# Altium PCB PCB2.PcbDoc (part 1 of 2)
Units mm, origin at the board's own origin, x right, y up, seen from the top; angles counter-clockwise.
Board outline 65.4 x 65.4 mm, 4 copper layers (Top Layer, Internal Plane 1, Signal Layer 1, Bottom Layer), stack 0.778 mm thick; 122 components, 87 nets, 418 pads, 912 vias.
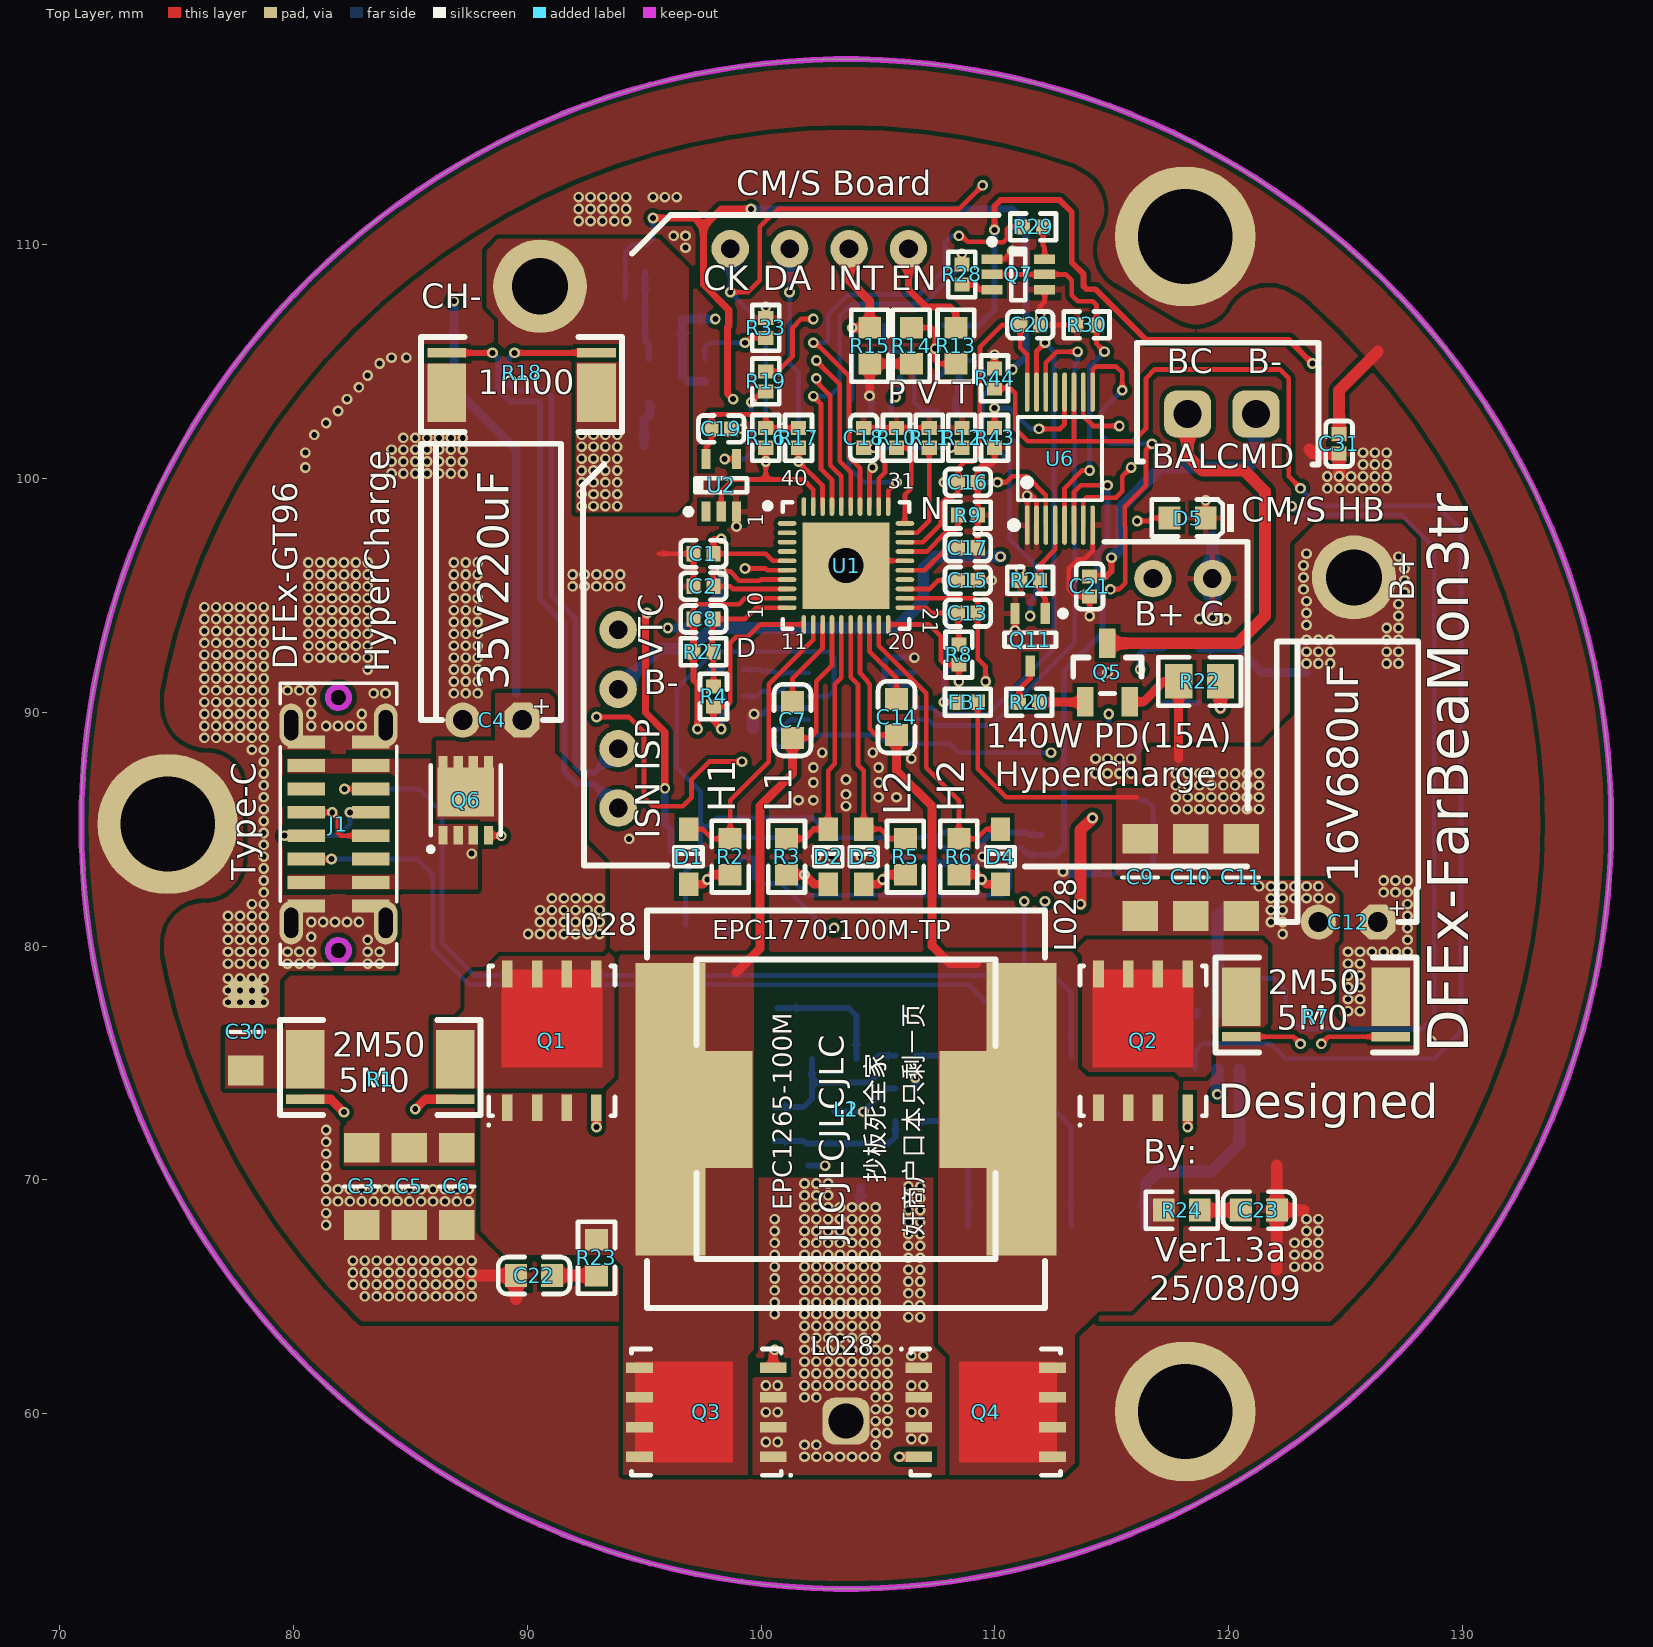
[diagram p0: Top Layer view]
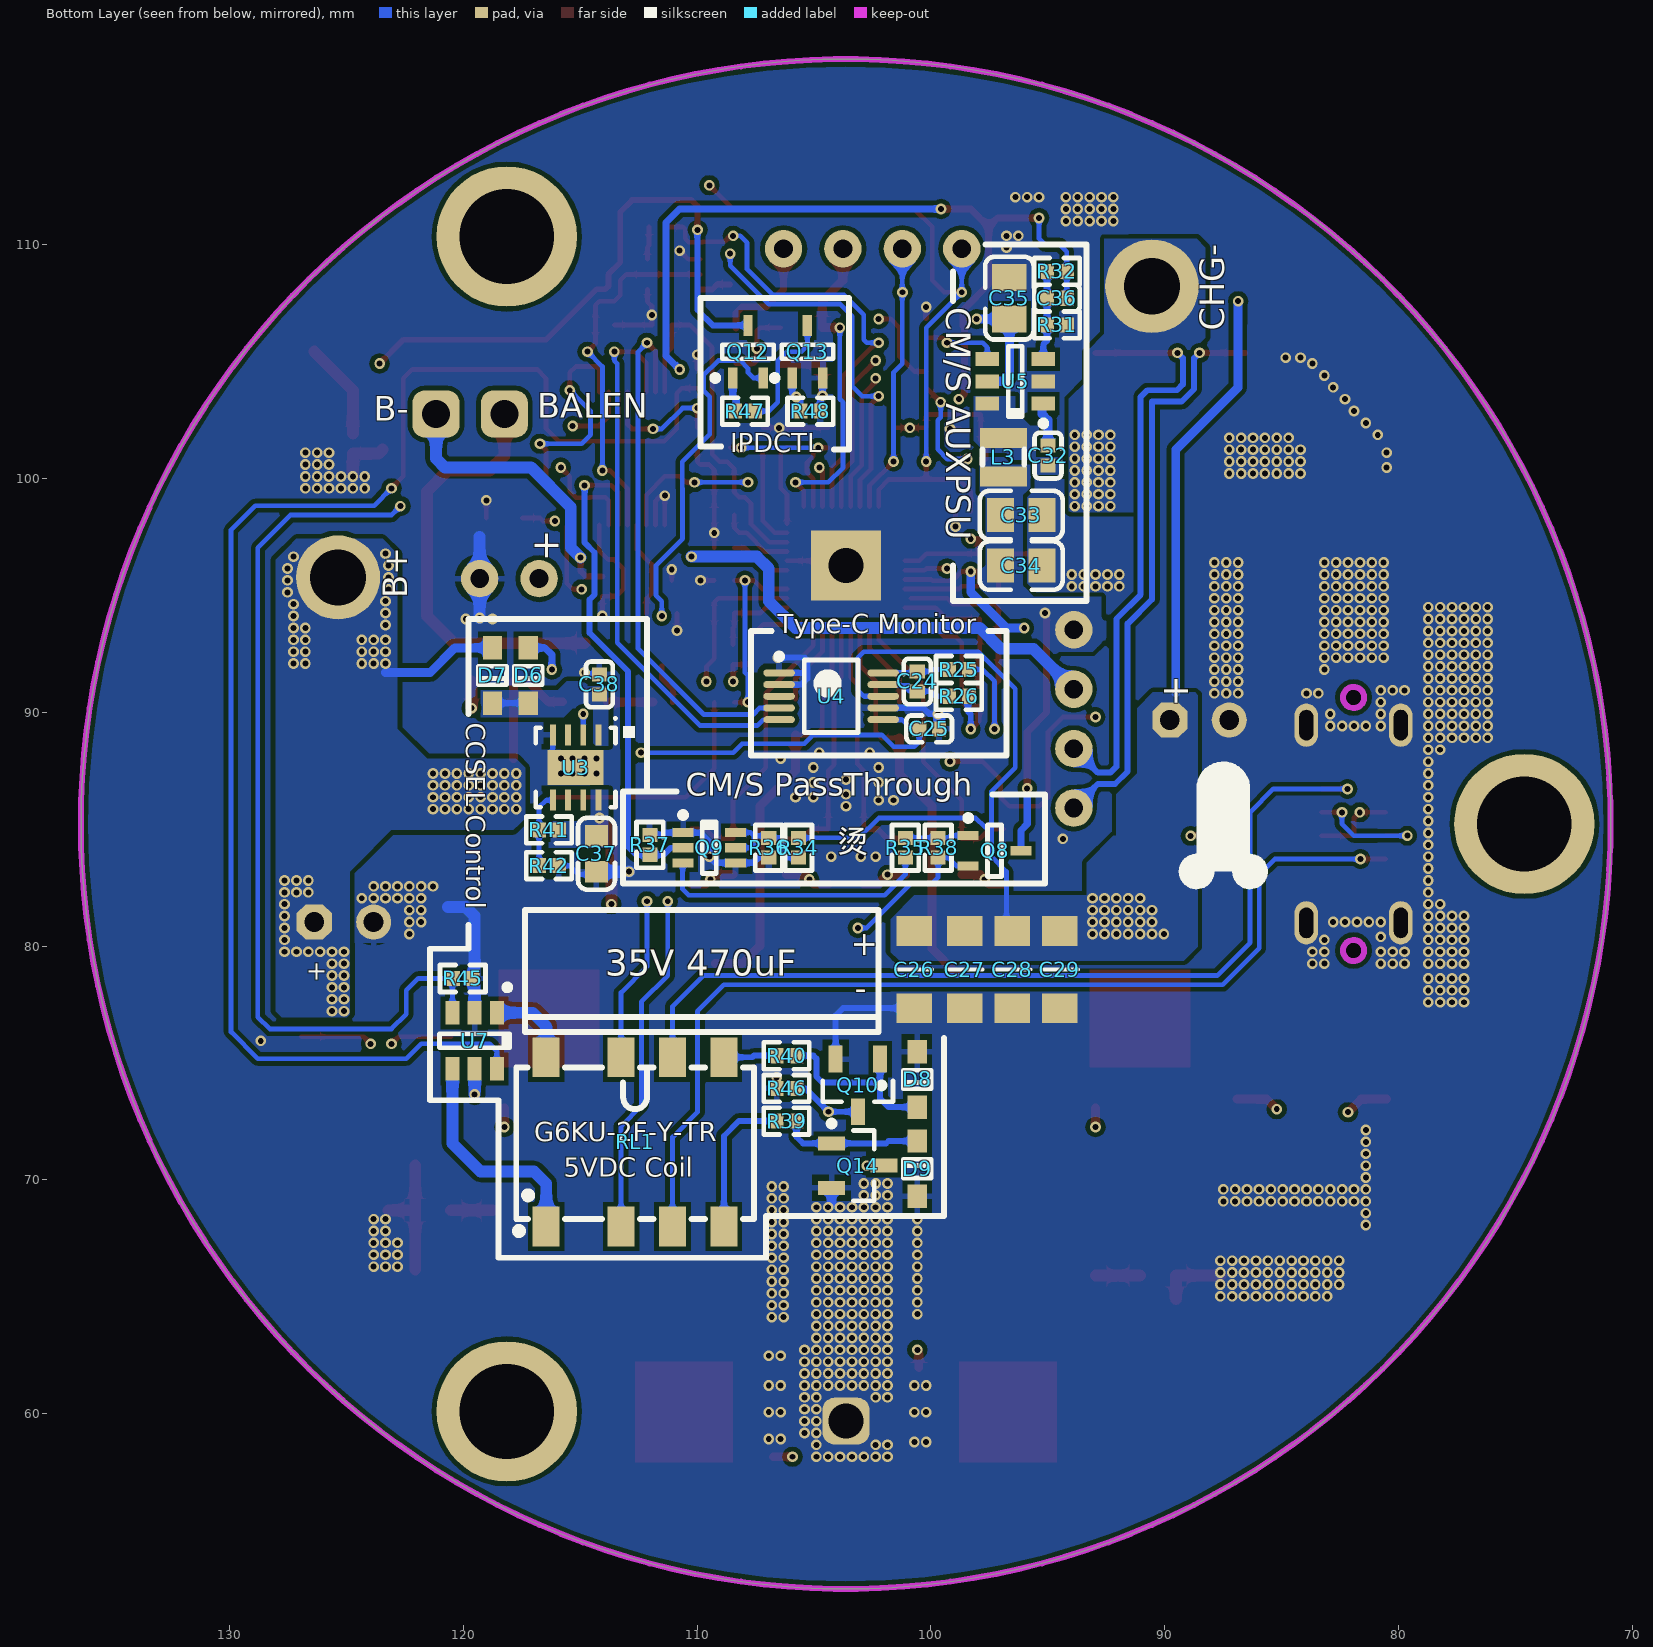
[diagram p1: Bottom Layer view, seen from below]
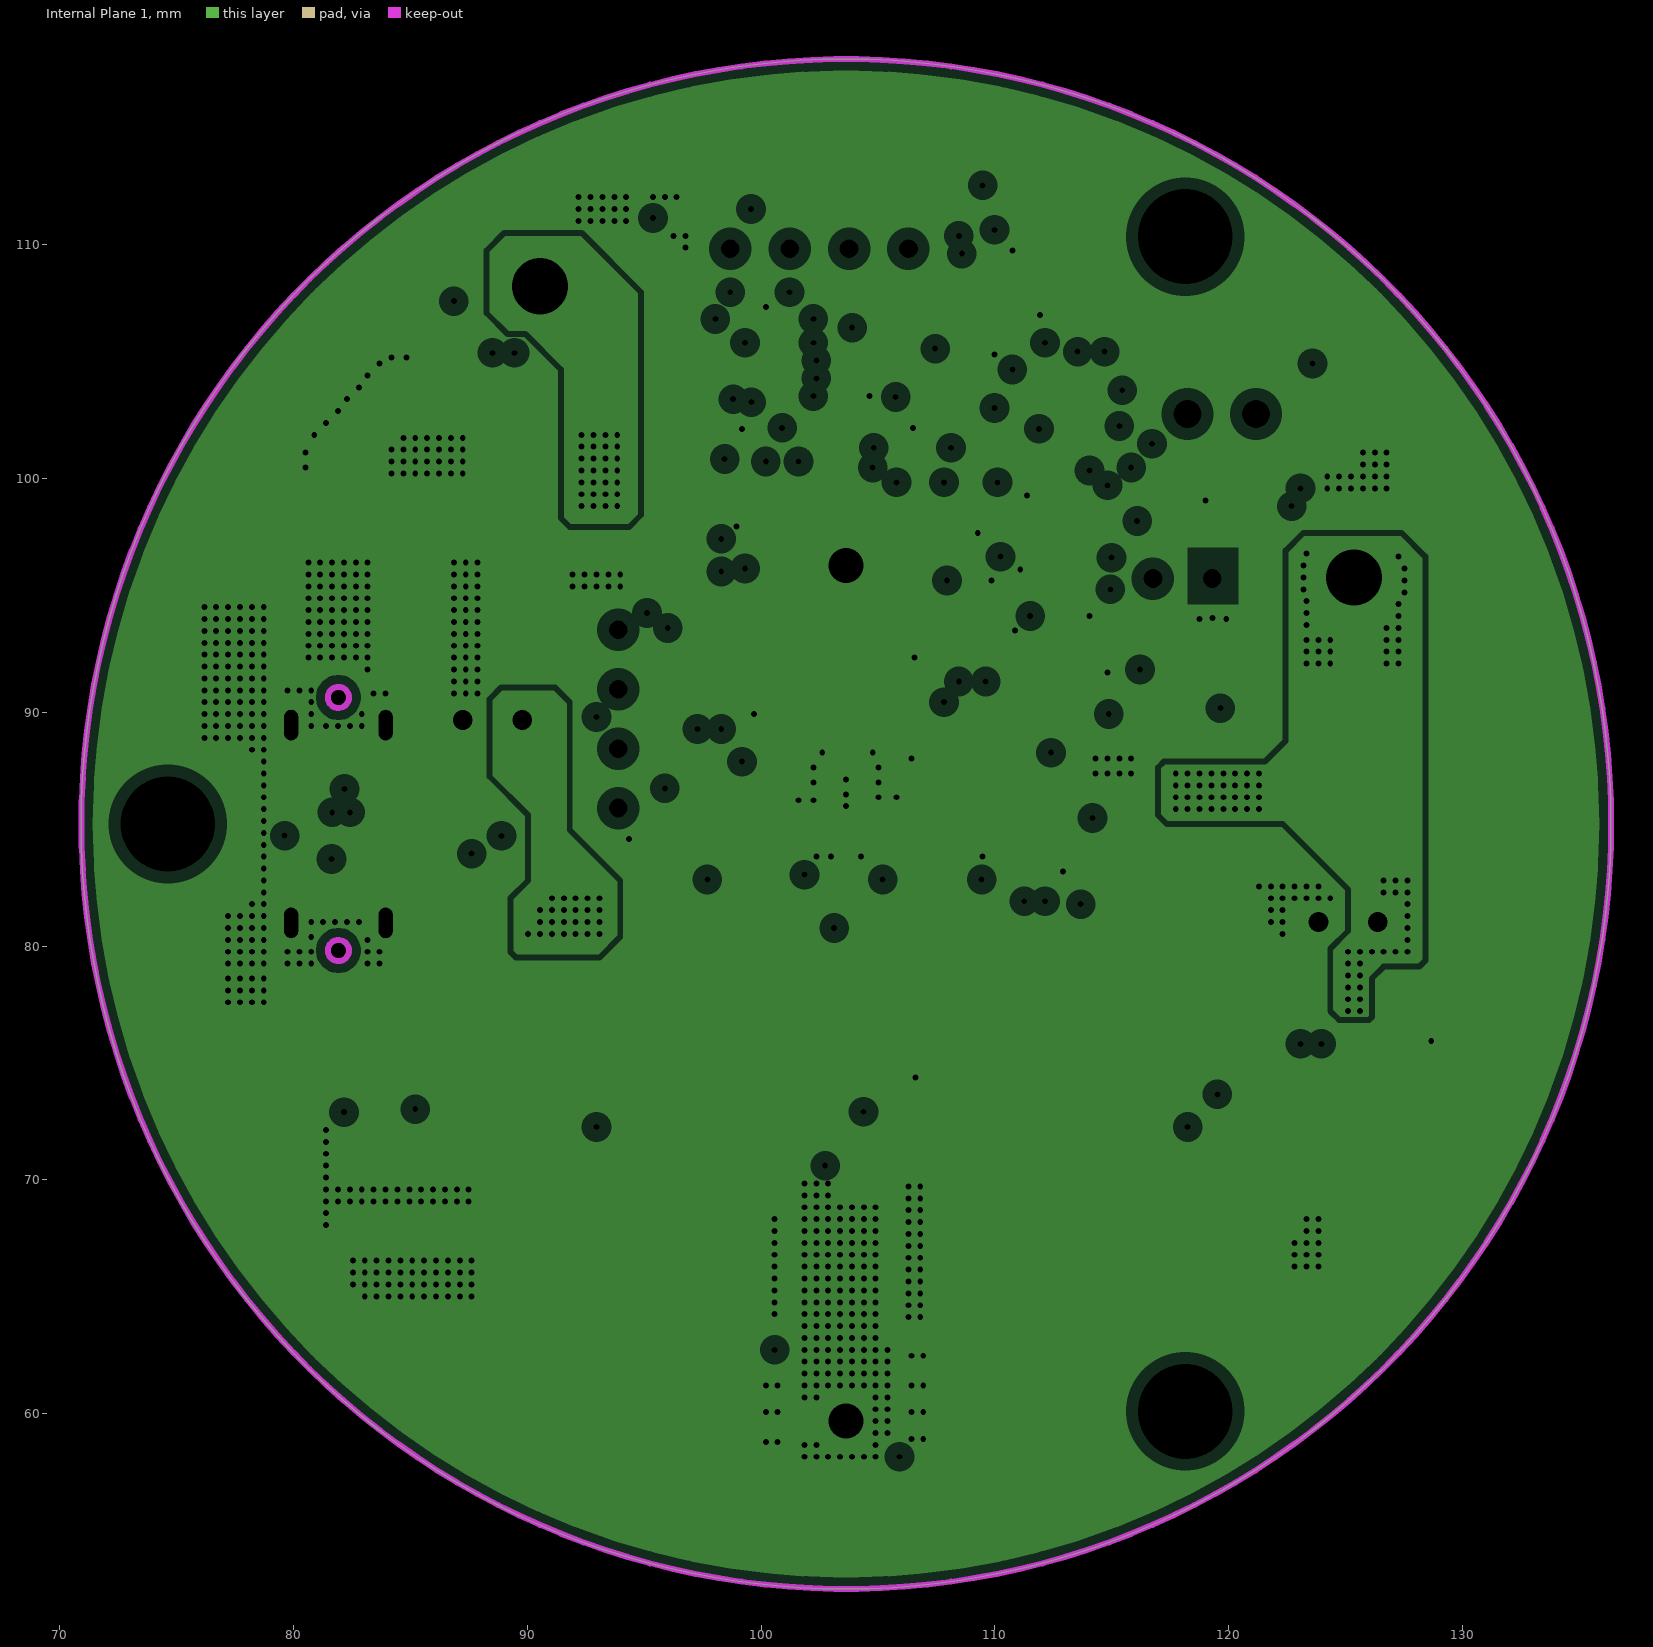
[diagram p2: Internal Plane 1, clearances drawn from the general rule]
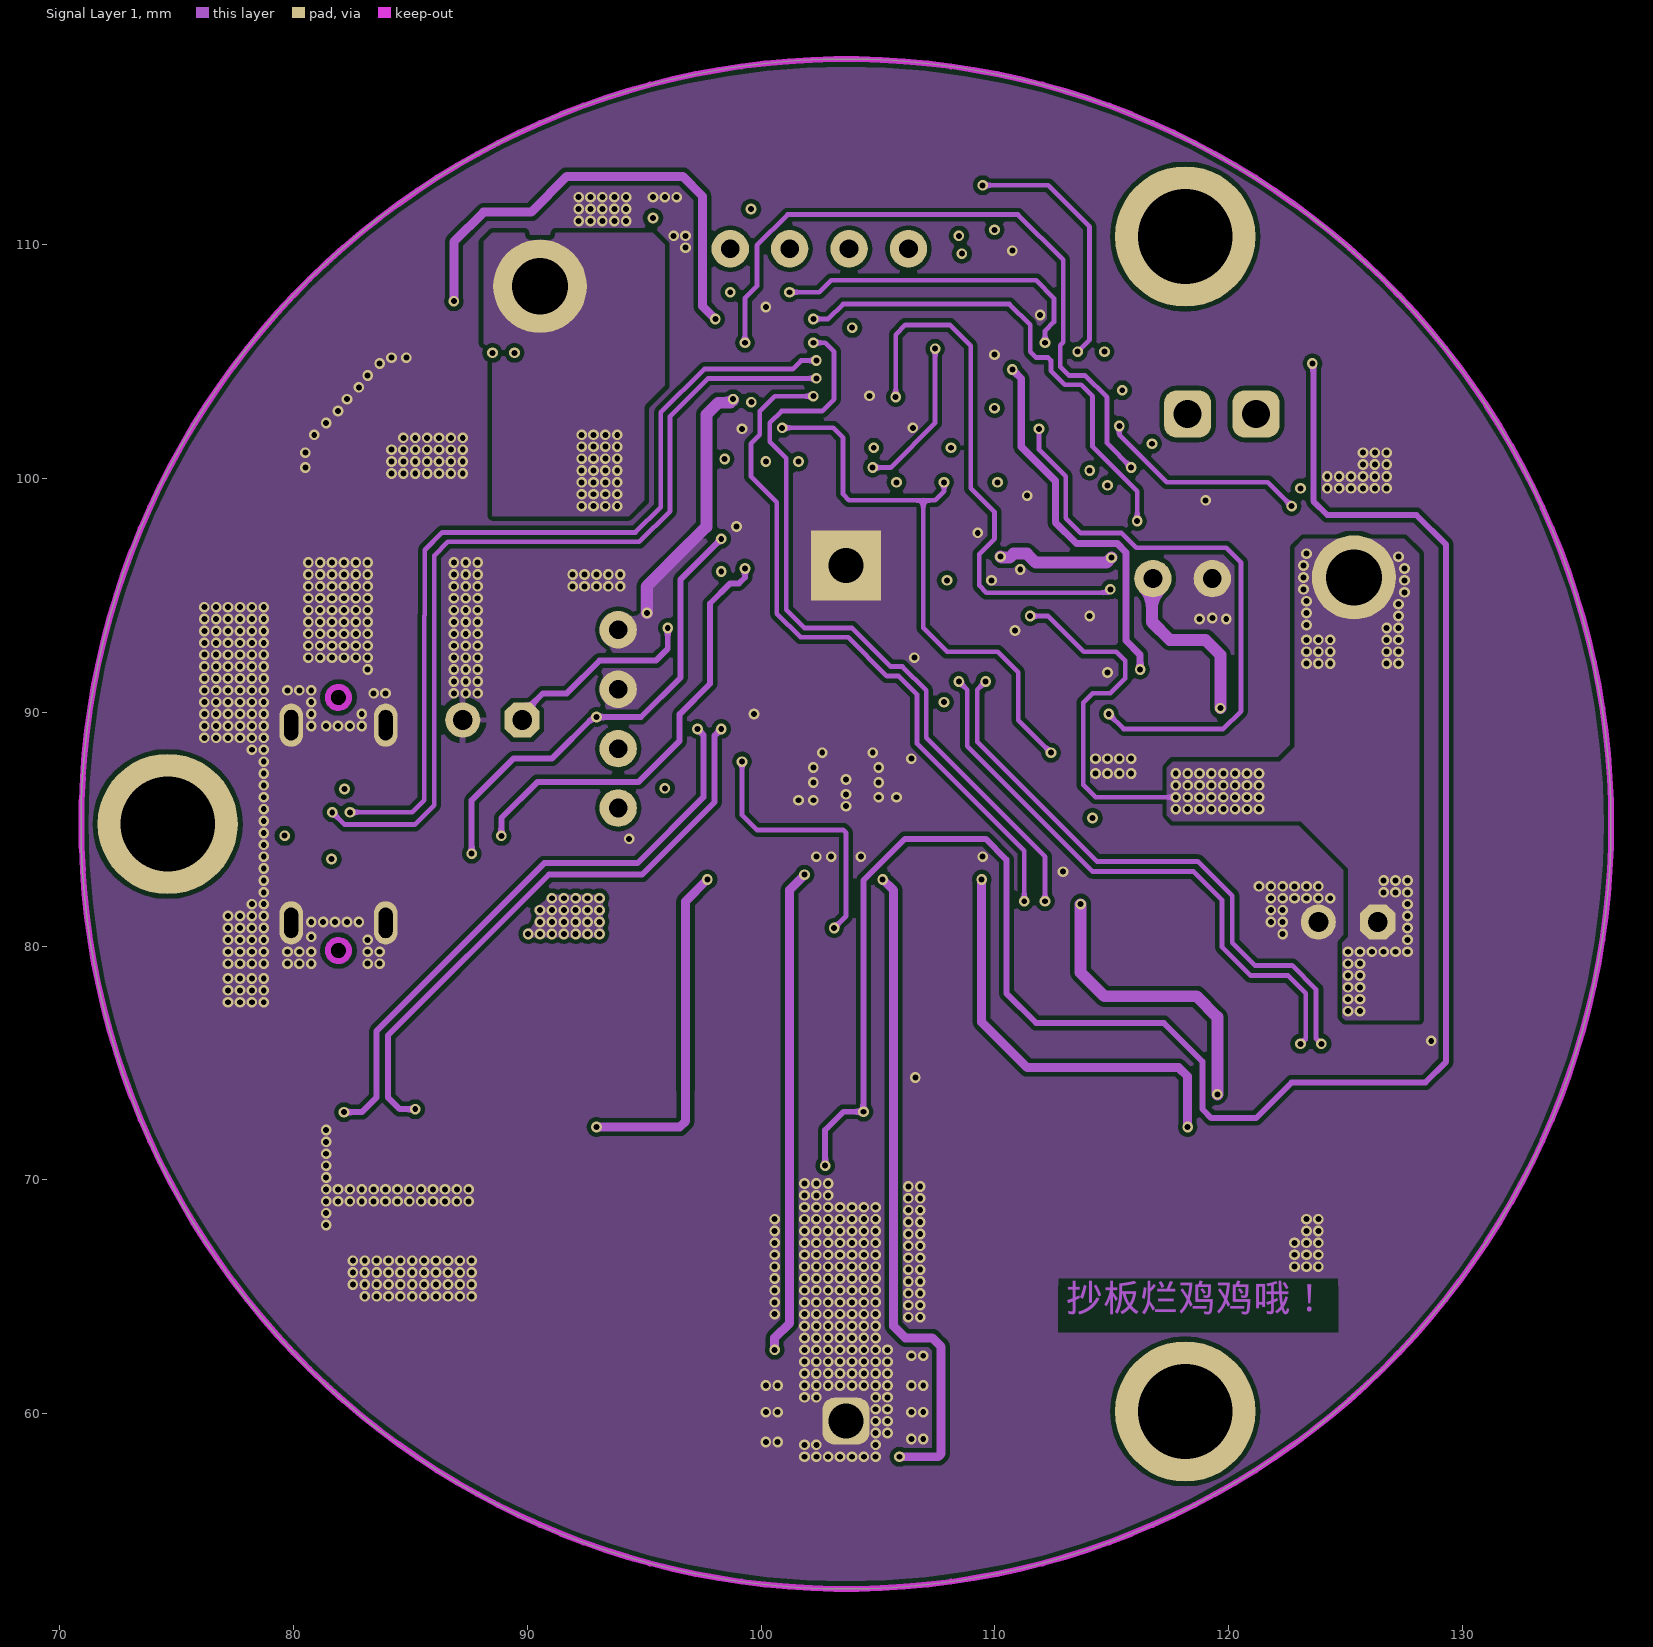
[diagram p3: Signal Layer 1]
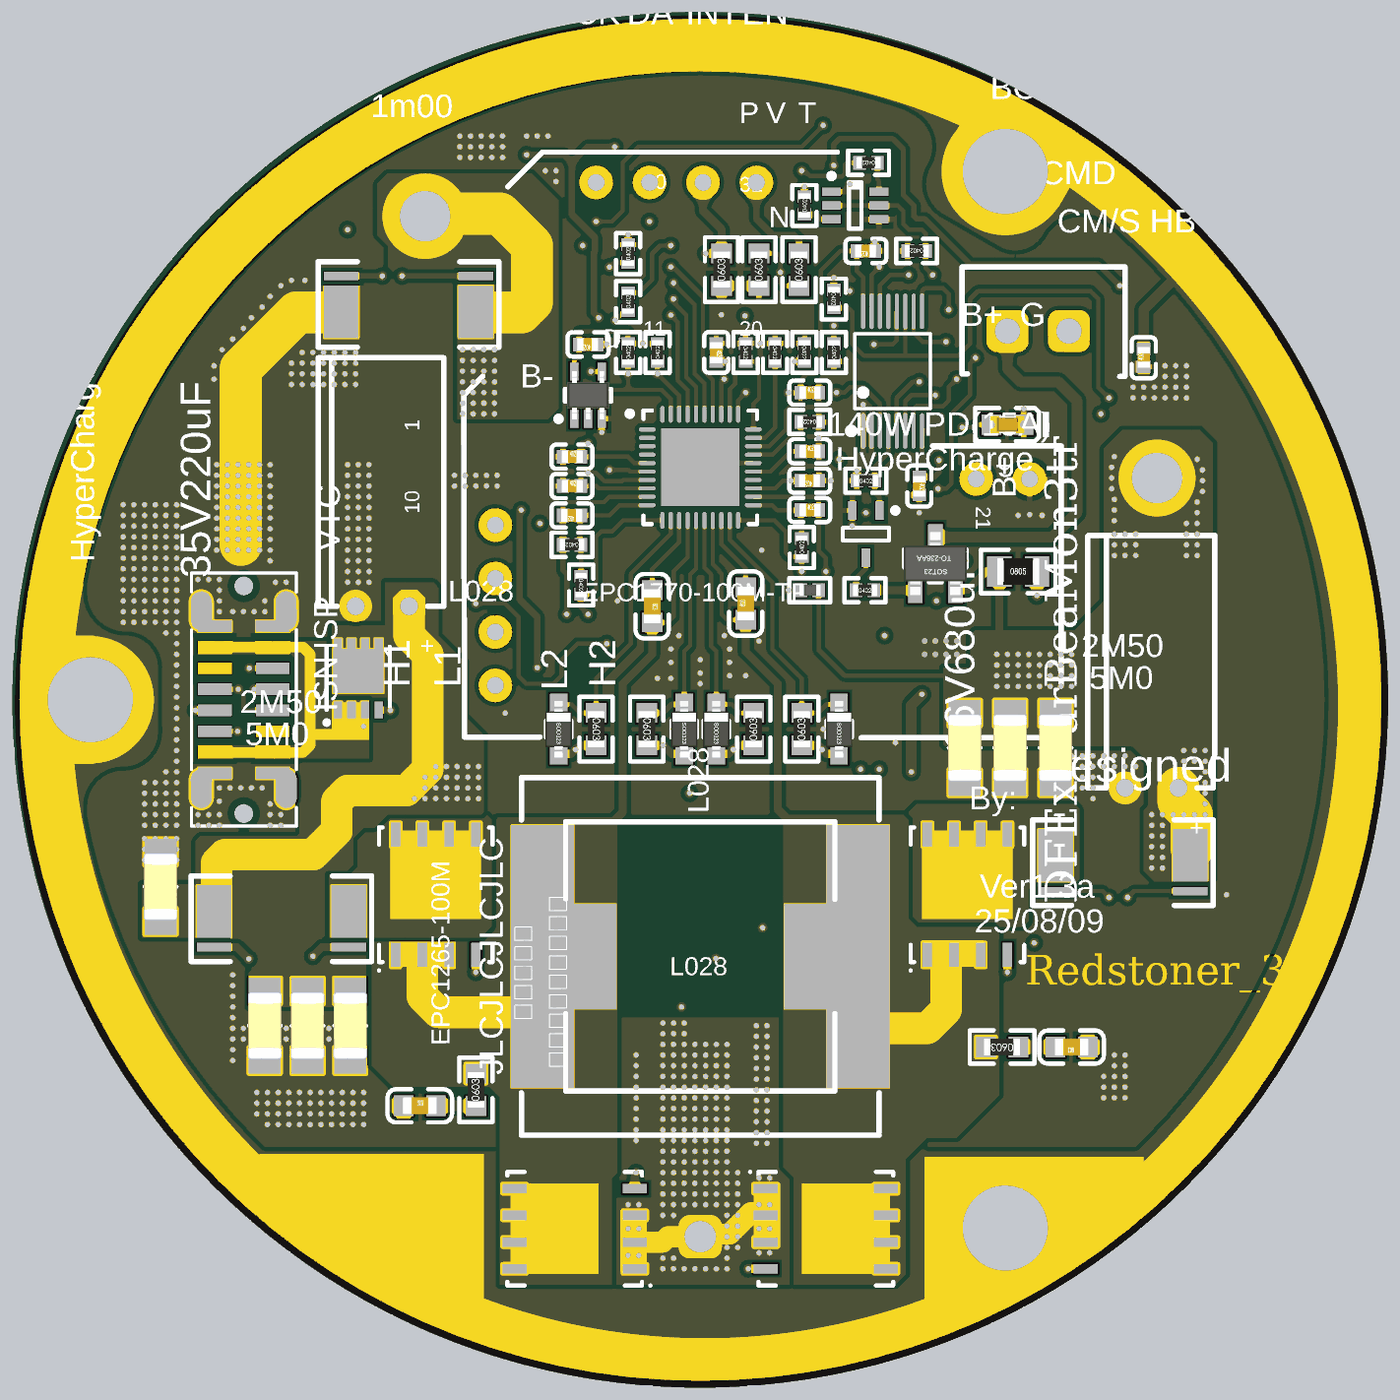
[diagram p5: 3D render of the assembled board from above, using the file's embedded part models]
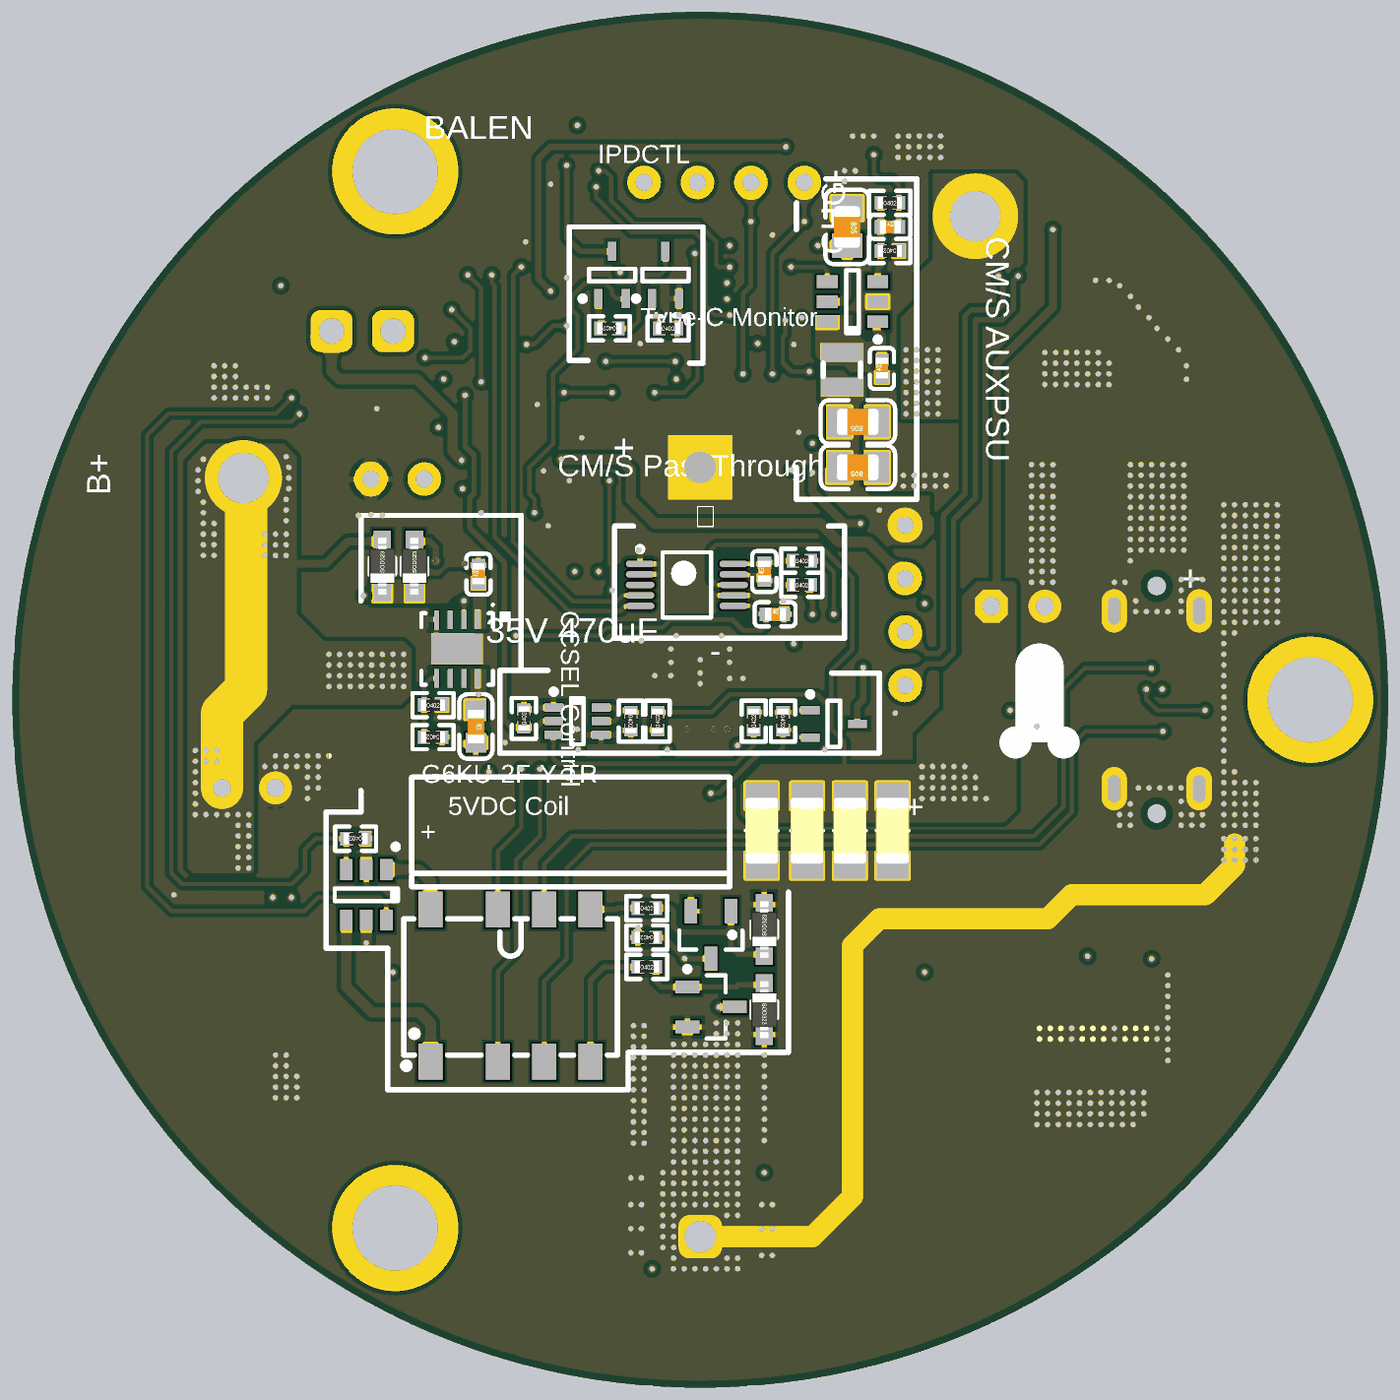
[diagram p6: 3D render of the assembled board from below, using the file's embedded part models]

## Layer stack, top to bottom
Top Solder: solder mask 0.0102, Solder Resist, Dk 3.5
Top Layer: signal copper 0.0356
Dielectric 1: core 0.254, FR-4, Dk 4.2
Internal Plane 1: plane copper 0.036
Dielectric 3: core 0.254, Dk 4.2
Signal Layer 1: signal copper 0.036
Dielectric 4: prepreg 0.127, Dk 4.2
Bottom Layer: signal copper 0.0356
Bottom Solder: solder mask 0.0102, Solder Resist, Dk 3.5

## Board outline
70.932,85.217 ccw(c103.632,85.217) 103.632,52.517 ccw(c103.632,85.217) 136.332,85.217 ccw(c103.632,85.217) 103.632,117.917 ccw(c103.632,85.217)

## Design rules (kind name [scope] priority, off if disabled: settings)
Clearance [All] p1: gap=0.196
DiffPairsRouting [All] p1: maxlimit=0.254 minlimit=0.203 mostfreqgap=0.229 toplayer_minwidth=0.203 toplayer_maxwidth=0.254 toplayer_prefwidth=0.254 midlayer1_minwidth=0.203 midlayer1_maxwidth=0.254 midlayer1_prefwidth=0.254 bottomlayer_minwidth=0.203 bottomlayer_maxwidth=0.254 bottomlayer_prefwidth=0.254 maxuncoupledlength=12.7
PlaneClearance [All] p1: clearance=0.508
PlaneConnect [All] p1: planeconnectstyle=Direct reliefexpansion=0.508 reliefentries=4 reliefconductorwidth=0.254 reliefairgap=0.254
PolygonConnect PolygonConnect_1 [IsVia] p1: connectstyle=Direct reliefconductorwidth=0.254 reliefentries=4 polygonreliefangle="90 Angle" airgapwidth=0.254
PolygonConnect [All] p2: connectstyle=Direct reliefconductorwidth=0.254 reliefentries=4 polygonreliefangle="90 Angle" airgapwidth=0.254
RoomDefinition main [InComponentClass('main')] p1: confinementstyle=ConfineIn formatcopy=TRUE lockcomponents=FALSE outline 178.943,24.257 229.489,24.257 229.489,39.37 178.943,39.37
RoutingVias [All] p1: holewidth=0.711 width=1.27 viastyle="Through Hole" minholewidth=0.711 minwidth=1.27 maxholewidth=0.711 maxwidth=1.27
SolderMaskExpansion [All] p1: expansion=0.102
Width [All] p1: maxlimit=50.8 minlimit=0.203 preferedwidth=0.254
27 further rules are at their usual default settings.

## Classes and differential pairs
differential pair ISEN: +ISEN_P -ISEN_N
differential pair BATIS: +BATIS_P -BATIS_N
differential pair IOUTSEN: +IOUTSEN_P -IOUTSEN_N

## Components (designator, comment, footprint, x,y, rotation, side; value= is the part's Value field where it differs from the comment)
C1 "100nF (104) 10% 50V" 0402_C 97.536,96.774 r0 top
C2 "470NF (474) 10% 50V" 0402_C 97.536,95.377 r0 top
C3 "C3216X5R1V226M160AC" 1206C 82.931,69.723 r90 top
C4 "SPZ1VM221E12O00RA" ElecCap_Hori 88.519,89.662 r90 top
C5 "C3216X5R1V226M160AC" 1206C 84.963,69.723 r90 top
C6 "C3216X5R1V226M160AC" 1206C 86.995,69.723 r90 top
C7 "220nF (224) 10% 25V" 0603_C 101.346,89.662 r270 top
C8 "470nF (474) 10% 10V" 0402_C 97.536,93.98 r180 top
C9 "C3216X5R1V226M160AC" 1206C 116.205,82.931 r90 top
C10 "C3216X5R1V226M160AC" 1206C 118.364,82.931 r90 top
C11 "C3216X5R1V226M160AC" 1206C 120.523,82.931 r90 top
C12 "SPT1CM681F14OR" ElecCap_Hori 125.095,81.026 r90 top
C13 "1.0uF (105) 10% 25V" 0402_C 108.839,94.234 r0 top
C14 "220nF (224) 10% 25V" 0603_C 105.791,89.789 r90 top
C15 "100nF (104) 10% 50V" 0402_C 108.839,95.631 r180 top
C16 "10uF (106) 20% 10V" 0402_C 108.839,99.822 r0 top
C17 "10uF (106) 20% 10V" 0402_C 108.839,97.028 r0 top
C18 "100nF (104) 10% 16V" 0402_C 104.394,101.727 r270 top
C19 "100nF (104) 10% 16V" 0402_C 98.298,102.108 r180 top
C20 "100nF (104) 10% 16V" 0402_C 111.506,106.553 r180 top
C21 "10nF (103) 10% 50V" 0402_C 114.046,95.377 r270 top
C22 "3.3nF (332) 10% 50V" 0603_C 90.297,65.913 r0 top
C23 "3.3nF (332) 10% 50V" 0603_C 121.285,68.707 r180 top
C24 "10uF (106) 20% 10V" 0402_C 100.584,91.313 r90 bottom
C25 "100nF (104) 10% 16V" 0402_C 100.076,89.281 r180 bottom
C26 "C3216X5R1V226M160AC" 1206C 100.711,78.994 r90 bottom
C27 "C3216X5R1V226M160AC" 1206C 98.552,78.994 r90 bottom
C28 "C3216X5R1V226M160AC" 1206C 96.52,78.994 r90 bottom
C29 "C3216X5R1V226M160AC" 1206C 94.488,78.994 r90 bottom
C30 "C3216X5R1V226M160AC" 1206C 77.978,76.327 r270 top
C31 "10nF (103) 10% 50V" 0402_C 124.714,101.473 r90 top
C32 "100nF (104) 10% 16V" 0402_C 94.996,100.965 r90 bottom
C33 "GRM21BR6YA106KE43L" 0805_C 96.139,98.425 r0 bottom
C34 "GRM21BR6YA106KE43L" 0805_C 96.139,96.266 r0 bottom
C35 "GRM21BR6YA106KE43L" 0805_C 96.647,107.696 r270 bottom
C36 "22pF (220) 5% 50V" 0402_C 94.615,107.696 r180 bottom
C37 "10uF (106) 10% 10V" 0603_C 114.3,83.947 r270 bottom
C38 "100nF (104) 10% 50V" 0402_C 114.173,91.186 r90 bottom
D1 "B5819WS S4" SOD-323 96.901,83.82 r270 top
D2 "B5819WS S4" SOD-323 102.87,83.82 r270 top
D3 "B5819WS S4" SOD-323 104.394,83.82 r270 top
D4 "B5819WS S4" SOD-323 110.236,83.82 r270 top
D5 "绿灯 0603" 0603_LED_S1 118.237,98.298 r180 top
D6 "1N5819WS S4" SOD-323 117.221,91.567 r90 bottom
D7 "1N5819WS S4" SOD-323 118.745,91.567 r90 bottom
D8 "CESD12VD3" SOD-323 100.584,74.295 r90 bottom
D9 "CESD12VD3" SOD-323 100.584,70.485 r270 bottom
FB1 "EBMS100505A050" 0402_L 108.839,90.424 r0 top
J1 "TYPEC-300-BCP16H105" TYPE-C-SMD_TYPE-C16PIN 81.932,85.217 r90 top locked
L1 "EPC1770-100M-TP" IND1770-HD 103.632,73.017 r0 top locked
L2 "EPC1265-100M-TP" EPC1265-xxxM 103.632,73.017 r0 top
L3 "FTC252010S220MBCA" SWPA252010S 96.901,100.076 r90 bottom
Q1 "IAUCN04S7L028ATMA1" SON/DFN5x6(MOS) 91.059,75.946 r90 top locked
Q2 "IAUCN04S7L028ATMA1" SON/DFN5x6(MOS) 116.332,75.946 r90 top
Q3 "IAUCN04S7L028ATMA1" SON/DFN5x6(MOS) 97.663,60.071 r180 top locked
Q4 "IAUCN04S7L028ATMA1" SON/DFN5x6(MOS) 109.601,60.071 r0 top locked
Q5 "SS8550 Y2" SOT-23(SOT-23-3) 114.808,91.694 r270 top
Q6 "BSZ018N04LS6" DFN-8_L3.0-W3.0-P0.65-BL 87.376,86.233 r0 top
Q7 "2N7002DW" SC70-6 110.998,108.712 r0 top
Q8 "BSS84PW" SC70-3 97.282,84.074 r180 bottom
Q9 "2N7002DW" SC70-6 109.474,84.201 r180 bottom
Q10 "MMBFJ177LT1G" SOT-23_N 103.124,74.041 r270 bottom locked
Q11 "2N7002KW" SC70-3 111.506,93.091 r270 top
Q12 "SS8550 Y2" SC70-3 107.823,105.41 r90 bottom
Q13 "2N7002KW" SC70-3 105.283,105.41 r90 bottom
Q14 "MMBFJ177LT1G" SOT-23_N 103.124,70.612 r180 bottom
R1 "2512 2.5mΩ 1%" 2512-Virtual4Wire 80.518,75.057 r0 top
R2 "0.5Ω (0R50) ±1%" 0603_R 98.679,83.82 r270 top
R3 "0.5Ω (0R50) ±1%" 0603_R 101.092,83.82 r270 top
R4 "51Ω (51R0) ±1%" 0402_R 97.969,90.669 r270 top
R5 "0.5Ω (0R50) ±1%" 0603_R 106.172,83.82 r90 top
R6 "0.5Ω (0R50) ±1%" 0603_R 108.458,83.82 r90 top
R7 "2512 2.5mΩ 1%" 2512-Virtual4Wire 120.523,77.724 r0 top
R8 "10Ω (10R0) ±1%" 0402_R 108.458,92.456 r90 top
R9 "6.2KΩ (6801) ±1%" 0402_R 108.839,98.425 r180 top
R10 "9.1KΩ (9101) ±1%" 0402_R 105.791,101.727 r270 top
R11 "9.1KΩ (9101) ±1%" 0402_R 107.188,101.727 r270 top
R12 "10KΩ (1002) ±1%" 0402_R 108.585,101.727 r270 top
R13 "47KΩ (3302) ±1%" 0603_R 108.331,105.664 r90 top
R14 "10KΩ (1002) ±1%" 0603_R 106.426,105.664 r90 top
R15 "330KΩ (3303) ±1%" 0603_R 104.648,105.664 r90 top
R16 "10KΩ (1002) ±1%" 0402_R 100.203,101.727 r90 top
R17 "10KΩ (1002) ±1%" 0402_R 101.6,101.727 r90 top
R18 "HoLR2512-3.5W-1mR-1%" 2512-Virtual4Wire 92.964,103.759 r180 top
R19 "2KΩ (2001) ±1%" 0402_R 100.203,104.14 r90 top
R20 "10KΩ (1002) ±1%" 0402_R 111.462,90.424 r0 top
R21 "10KΩ (1002) ±1%" 0402_R 111.506,95.631 r0 top
R22 "1.0Ω (1R0) ±1%" 0805_R 118.745,91.313 r0 top
R23 "2.2Ω (2R20) ±1%" 0603_R 92.964,66.675 r90 top
R24 "2.2Ω (2R20) ±1%" 0603_R 117.983,68.707 r180 top
R25 "4.7Ω (4R70) ±1%" 0402_R 98.806,91.821 r180 bottom
R26 "4.7Ω (4R70) ±1%" 0402_R 98.806,90.678 r180 bottom
R27 "3KΩ (3001) ±1%" 0402_R 97.536,92.583 r180 top
R28 "0402-DNP" 0402_R 108.585,108.712 r90 top
R29 "5.1KΩ (5101) ±1%" 0402_R 111.633,110.744 r180 top
R30 "10KΩ (1002) ±1%" 0402_R 113.919,106.553 r180 top
R31 "33KΩ (3302) ±1%" 0402_R 94.615,106.553 r0 bottom
R32 "499KΩ (4993) ±1%" 0402_R 94.615,108.839 r180 bottom
R33 "10KΩ (1002) ±1%" 0402_R 100.203,106.426 r90 top
R34 "200KΩ (2003) ±1%" 0402_R 105.664,84.201 r90 bottom
R35 "100KΩ (1003) ±1%" 0402_R 101.092,84.201 r90 bottom
R36 "200KΩ (2003) ±1%" 0402_R 106.934,84.201 r270 bottom
R37 "10KΩ (1002) ±1%" 0402_R 112.014,84.328 r90 bottom
R38 "100KΩ (1003) ±1%" 0402_R 99.695,84.201 r270 bottom
R39 "5.1KΩ (5101) ±1%" 0402_R 106.172,72.517 r180 bottom
R40 "5.1KΩ (5101) ±1%" 0402_R 106.172,75.311 r180 bottom
R41 "510KΩ (5103) ±1%" 0402_R 116.332,84.963 r180 bottom
R42 "150KΩ (1503) ±1%" 0402_R 116.332,83.439 r0 bottom
R43 "10KΩ (1002) ±1%" 0402_R 109.982,101.727 r90 top
R44 "10KΩ (1002) ±1%" 0402_R 109.982,104.267 r270 top
R45 "10KΩ (1002) ±1%" 0402_R 120.015,78.613 r0 bottom
R46 "22KΩ (2202) ±1%" 0402_R 106.172,73.914 r0 bottom
R47 "10KΩ (1002) ±1%" 0402_R 107.95,102.87 r0 bottom
R48 "10KΩ (1002) ±1%" 0402_R 105.156,102.87 r180 bottom
RL1 "G6KU-2F-Y-TR DC5" RELAY-SMD_G6K-2F-Y 112.649,71.628 r180 bottom
U1 "IP2366_I2C" QFN40-IP2366 103.632,96.266 r0 top
U2 "SN74LVC1G14DCKR" DCK0005A_N 98.298,99.695 r90 top
U3 "MPQ2013AGQ-AEC1" MPQ2013A-QFN8 115.189,87.63 r270 bottom
U4 "INA226AIDGSR" MSOP-10 104.267,90.678 r180 bottom
U5 "LGS5148" SOT95P245X110-6N 96.393,104.14 r0 bottom
U6 "PCA9538DGV" TVSOP-16_L3.6-W4.4-P0.40-LS6.4-BL 112.776,100.838 r0 top
U7 "CN8021B" SOT95P245X110-6N 119.507,75.946 r270 bottom locked

## Footprints (in the part's own frame and the unit in brackets; to place one, negate y for a bottom-side part, rotate by r counter-clockwise, add the part's x,y. Pads: shape width x height; smd on the part's side, far side on the other; paste and mask are expansions set on the pad)
0402_C [mm]
  rect 0.6x0.65 smd mask+0.051: 1(-0.425,0) 2(0.425,0)
  silkscreen extent -0.97,-0.58 0.97,0.58, body extent -0.48,-0.3 0.52,0.3, height 0.2
0402_L [mm]
  rect 0.6x0.65 smd mask+0.051: 1(-0.425,0) 2(0.425,0)
  silkscreen extent -0.97,-0.58 0.97,0.58, body extent -0.51,-0.26 0.54,0.26, height 0.36
0402_R [mm]
  rect 0.6x0.65 smd mask+0.051: 1(-0.425,0) 2(0.425,0)
  silkscreen extent -0.97,-0.58 0.97,0.58, body extent -0.57,-0.27 0.58,0.28, height 0.41
0603_C [mm]
  rect 0.93x0.98 smd: 1(-0.77,0) 2(0.77,0)
  silkscreen extent -1.53,-0.79 1.54,0.79, body extent -0.8,-0.4 0.8,0.4, height 0.3
0603_LED_S1 [mm]
  rect 0.93x0.98 smd: A(0.77,0) K(-0.77,0)
  silkscreen extent -1.98,-0.79 1.54,0.79, body extent -0.8,-0.4 0.8,0.4, height 0.6
0603_R [mm]
  rect 0.93x0.98 smd: 1(-0.77,0) 2(0.77,0)
  silkscreen extent -1.53,-0.79 1.54,0.79, body extent -0.85,-0.4 0.85,0.4, height 0.56
0805_C [mm]
  rect 1.16x1.47 smd: 1(-0.89,0) 2(0.89,0)
  silkscreen extent -1.77,-1.04 1.77,1.04, body extent -1,-0.62 1,0.63, height 0.77
0805_R [mm]
  rect 1.16x1.47 smd: 1(-0.89,0) 2(0.89,0)
  silkscreen extent -1.77,-1.04 1.77,1.03, body extent -1,-0.62 1,0.63, height 0.49
1206C [mil]
  rect 50x60 smd: 1(-65,0) 2(65,0)
  silkscreen extent 0,-30 0,30, body extent -63,-31 63,31, height 37
2512-Virtual4Wire [mm] "2512 Shunt Resistor Virtual 4Wire Connection"
  rect 1.65x2.5 smd mask+0.05: 0(0,0.1) 1(6.401,0.1)
  rect 1.65x0.4 smd mask+0.05: 2(0,-1.6) 3(6.401,-1.6)
  silkscreen extent -1.09,-2.28 7.49,1.78, body extent 0,-1.78 6.48,1.4, height 1
DCK0005A_N [mm] "SOT23, 5-Leads, Body 2.15x1.4mm, Pitch 0.65mm, IPC Medium Density"
  rect 0.85x0.4 smd: 1(-1.125,0.65) 2(-1.125,0) 3(-1.125,-0.65) 4(1.125,-0.65) 5(1.125,0.65)
  silkscreen extent -1.25,-1.1 0.3,1.52, body extent -1.14,-1 1.14,1, height 1.1
DFN-8_L3.0-W3.0-P0.65-BL [mm]
  rect 0.4x0.8 smd paste-100 mask+0.051: 1(-0.975,-1.5) 2(-0.325,-1.5) 3(0.325,-1.5) 4(0.975,-1.5) 5(0.975,1.5) 6(0.325,1.5) 7(-0.325,1.5) 8(-0.975,1.5)
  rect 2.4x2.1 smd paste-100 mask+0.051: 8(0,0.35)
  silkscreen extent -1.6,-2.2 1.5,1.5, body extent -1.52,-1.52 1.52,1.52, height 1.2
ElecCap_Hori [mm] "水平安装的电容 6x12mm"
  oct 1.5x1.5 hole 0.85 mask+0.03: 1(0,-1.27)
  round 1.5 hole 0.85 mask+0.03: 2(0,1.27)
  silkscreen extent 0,-2.92 1.4,3.05
EPC1265-xxxM [mm] "汇磁羟基粉1265电感"
  rect 3.25x5 smd mask+0.03: 1(-5.625,0) 2(5.625,0)
  silkscreen extent -6.4,-6.4 6.4,6.4, body extent -6.35,-6.35 6.35,6.35, height 6.5
IND1770-HD [mm] "1770尺寸电感（高密度封装需要打胶固定）"
  rect 3x12.5 smd mask+0.03: 1(-7.5,0) 2(7.5,0)
  silkscreen extent -8.5,-8.5 8.5,8.5, body extent -8.51,-8.51 8.51,8.51, height 7
MPQ2013A-QFN8 [mm] "SON, 8-Leads, Body 3.00x3.00mm, Pitch 0.65mm, Thermal Pad 2.40x1.49mm, IPC Medium Density"
  rect 0.9x0.25 smd mask+0.03: 1(-1.395,0.975) 2(-1.395,0.325) 3(-1.395,-0.325) 4(-1.395,-0.975) 5(1.395,-0.975) 6(1.395,-0.325) 7(1.395,0.325) 8(1.395,0.975)
  rect 1.49x2.4 smd mask+0.03: 9(0,0)
  silkscreen extent -2.15,-1.7 1.7,1.75, body extent -1.55,-1.55 1.55,1.55, height 1
MSOP-10 [mm] "TSSOP, 10-Leads, Body 3.00x3.00mm, Pitch 0.50mm, IPC Medium Density"
  oval 1.35x0.3 smd: 1(-2.225,1) 2(-2.225,0.5) 3(-2.225,0) 4(-2.225,-0.5) 5(-2.225,-1) 6(2.225,-1) 7(2.225,-0.5) 8(2.225,0) 9(2.225,0.5) 10(2.225,1)
  silkscreen extent -2.35,-1.55 1.15,1.82, body extent -1.55,-1.55 1.55,1.55, height 1.1
QFN40-IP2366 [mm] "QFN, 40-Leads, Body 5.00x5.00mm, Pitch 0.40mm, Thermal Pad 3.70x3.70mm, IPC Medium Density"
  oval 0.8x0.2 smd mask+0.02: 1(-2.52,1.8) 2(-2.52,1.4) 3(-2.52,1) 4(-2.52,0.6) 5(-2.52,0.2) 6(-2.52,-0.2) 7(-2.52,-0.6) 8(-2.52,-1) 9(-2.52,-1.4) 10(-2.52,-1.8) 21(2.52,-1.8) 22(2.52,-1.4) 23(2.52,-1) 24(2.52,-0.6) 25(2.52,-0.2) 26(2.52,0.2) 27(2.52,0.6) 28(2.52,1) 29(2.52,1.4) 30(2.52,1.8)
  oval 0.2x0.8 smd mask+0.02: 11(-1.8,-2.52) 12(-1.4,-2.52) 13(-1,-2.52) 14(-0.6,-2.52) 15(-0.2,-2.52) 16(0.2,-2.52) 17(0.6,-2.52) 18(1,-2.52) 19(1.4,-2.52) 20(1.8,-2.52) 31(1.8,2.52) 32(1.4,2.52) 33(1,2.52) 34(0.6,2.52) 35(0.2,2.52) 36(-0.2,2.52) 37(-0.6,2.52) 38(-1,2.52) 39(-1.4,2.52) 40(-1.8,2.52)
  rect 3.7x3.7 smd mask+0.02: 41(0,0)
  silkscreen extent -3.47,-2.7 2.7,2.7, body extent -2.55,-2.55 2.55,2.55, height 0.8
RELAY-SMD_G6K-2F-Y [mm]
  rect 1.15x1.7 smd: 1(-3.8,-3.618) 2(-0.6,-3.618) 3(1.6,-3.618) 4(3.8,-3.618) 5(3.8,3.618) 6(1.6,3.618) 7(-0.6,3.618) 8(-3.8,3.618)
  silkscreen extent -5.11,-3.96 5.08,3.18, body extent -5.08,-3.3 5.08,3.18, height 5.2
SC70-3 [mm] "3 Lead SC70(SOT-323) package for small Transistor"
  rect 0.9x0.4 smd mask+0.05: 1(-1.125,0.65) 2(-1.125,-0.65) 3(1.125,0)
  silkscreen extent -1.25,-1.1 0.3,1.52, body extent -0.67,-1.1 0.67,1.1, height 1.1
SC70-6 [mm] "SOT23, 6-Leads, Body 2.00x2.10mm, Pitch 0.65mm, IPC Medium Density"
  rect 0.9x0.4 smd mask+0.05: 1(-1.125,0.65) 2(-1.125,0) 3(-1.125,-0.65) 4(1.125,-0.65) 5(1.125,0) 6(1.125,0.65)
  silkscreen extent -1.25,-1.1 0.3,1.52, body extent -0.67,-1.1 0.67,1.1, height 1.1
SOD-323 [mm]
  rect 1x0.83 smd: 1(1.18,0) 2(-1.18,0)
  silkscreen extent -0.4,-0.6 0.4,0.6, body extent -1.35,-0.62 1.35,0.63, height 1.1
SON/DFN5x6(MOS) [mm] "SON, 8-Leads, Body 5.00x6.00mm, Pitch 1.27mm, Thermal Pad 4.00x3.53mm, IPC Low Density"
  rect 1.15x0.45 smd: 1(-2.86,1.905) 2(-2.86,0.635) 3(-2.86,-0.635) 4(-2.86,-1.905) 5(2.86,-1.905) 6(2.86,-0.635) 7(2.86,0.635) 8(2.86,1.905)
  Top Layer region: -1.143,-2.159 3.048,-2.159 3.048,2.159 -1.143,2.159
  silkscreen extent -3.65,-2.7 3.2,2.75, body extent -3.05,-2.55 3.05,2.55, height 1.05
SOT95P245X110-6N [mm] "SOT23, 6-Leads, Body 2.90x2.45mm, Pitch 0.95mm, IPC Medium Density"
  rect 1x0.6 smd: 1(-1.2,0.95) 2(-1.2,0) 3(-1.2,-0.95) 4(1.2,-0.95) 5(1.2,0) 6(1.2,0.95)
  silkscreen extent -1.32,-1.5 0.3,1.92, body extent -0.7,-1.5 0.7,1.5, height 1.1
SOT-23(SOT-23-3) [mm]
  rect 1.25x0.7 smd: 1(1.25,-0.95) 2(1.25,0.95) 3(-1.25,0)
  silkscreen extent -0.65,-1.46 0.9,1.46, body extent -1.5,-1.5 1.5,1.5, height 1.3
SOT-23_N [mm] "SOT23, 3-Leads, Body 2.9x1.3mm, Pitch 0.95mm, Lead Span 2.5mm, IPC Medium Density"
  rect 1.15x0.6 smd: 1(-1.125,0.95) 2(-1.125,-0.95) 3(1.125,0)
  silkscreen extent -0.2,-1.5 0.7,1.5, body extent -0.7,-1.5 0.7,1.5, height 1.1
SWPA252010S [mm] "小型绕线电感"
  rect 0.85x2 smd mask+0.03: 1(0,0) 2(1.65,0)
  silkscreen extent 0.51,-0.89 1.14,0.89, body extent -0.13,-1.02 1.78,1.02, height 3.06
TVSOP-16_L3.6-W4.4-P0.40-LS6.4-BL [mm]
  oval 0.2x1.687 smd mask+0.02: 1(-1.4,-2.844) 2(-1,-2.844) 3(-0.6,-2.844) 4(-0.2,-2.844) 5(0.2,-2.844) 6(0.6,-2.844) 7(1,-2.844) 8(1.4,-2.844) 9(1.4,2.844) 10(1,2.844) 11(0.6,2.844) 12(0.2,2.844) 13(-0.2,2.844) 14(-0.6,2.844) 15(-1,2.844) 16(-1.4,2.844)
  silkscreen extent -2.11,-2.99 1.8,1.78
TYPE-C-SMD_TYPE-C16PIN [mm]
  oval 1.85x1 hole 0.6 slot 1.3 at 0 deg: 1(-4.225,-2.02) 1(-4.225,2.02) 1(4.225,-2.02) 1(4.225,2.02)
  rect 0.55x1.6 smd paste-100 mask+0.051: 1(-3.5,-1.376) 1(-3.5,1.376) 1(3.5,-1.376) 1(3.5,1.376) 2(-2.5,-1.376) 2(-2.5,1.376) 2(2.5,-1.376) 2(2.5,1.376) A5(-1.5,1.376) A6(-0.5,1.376) A7(0.5,1.376) A8(1.5,1.376) B5(1.5,-1.376) B6(0.5,-1.376) B7(-0.5,-1.376) B8(-1.5,-1.376)
  Keep-Out Layer circle w0.005: c-5.41,0 r0.45
  Keep-Out Layer circle w0.005: c5.41,0 r0.45
  Keep-Out Layer board cut-out: -4.96,0 -5.005,0.195 -5.129,0.352 -5.31,0.439 -5.51,0.439 -5.691,0.352 -5.815,0.195 -5.86,0 -5.86,0 -5.815,-0.195 -5.691,-0.352 -5.51,-0.439 -5.31,-0.439 -5.129,-0.352 -5.005,-0.195 -4.96,0
  Keep-Out Layer board cut-out: 5.86,0 5.815,0.195 5.691,0.352 5.51,0.439 5.31,0.439 5.129,0.352 5.004,0.195 4.96,0 4.96,0 5.004,-0.195 5.129,-0.352 5.31,-0.439 5.51,-0.439 5.691,-0.352 5.815,-0.195 5.86,0
  Keep-Out Layer circle w0.254: c-5.41,0 r0.45
  Keep-Out Layer circle w0.254: c5.41,0 r0.45
  silkscreen extent -6,-2.5 6.03,2.49

## Part data
C1 C15 C18 C19 C20 C25 C32 C38: library part "0402 100nF (104) 10% 16V", "贴片电容"
C2 C13: library part "0402 1.0uF (105) 10% 25V", "贴片电容"
C3 C5 C6 C9 C10 C11 C26 C27 C28 C29 C30: library part Cap, "1206尺寸TDK MLCC 35V 22uF"
C4: library part CAP2, "直插固态电容，耐压35V容量220uF，尺寸6x11"
C7 C14: library part "0603 220nF (224) 10% 25V", "贴片电容"
C8: library part "0402 470nF (474) 10% 10V", "贴片电容"
C12: library part CAP2, "直插固态电容，耐压16V容量680uF，尺寸6x11"
C16 C17 C24: library part "0402 10uF (106) 20% 6.3V", "贴片电容"
C21 C31: library part "0402 10nF (103) 10% 50V", "贴片电容"
C22 C23: library part "0603 3.3nF (332) 10% 50V", "贴片电容"
C33 C34: library part "0805 22uF (226) 20% 25V", "0805 10uF±10% 35V X5R贴片电容"
C35: library part "0805 4.7uF (475) 10% 25V", "0805 10uF±10% 35V X5R贴片电容"
C36: library part "0402 22pF (220) 5% 50V", "贴片电容"
C37: library part "0603 10uF (106) 10% 10V", "贴片电容"
D1 D2 D3 D4 D6 D7: library part "SOD-323 1N4148WS T4", "二极管"
D5: library part "0603 绿灯", "发光二极管"
D8 D9: library part "SOD-323 1N4148WS T4", "TVS瞬态抑制二极管，12V击穿电压"
FB1: library part "0402 12nH  5%", "贴片磁珠 200mA 5R±25% 100MHz"
J1: "立贴16Pin Type-C接口，总高度10.5mm"
L1: library part "Inductor Iron", "汇磁一体成型羟基粉电感，1770尺寸，10uH±20% 9.50mΩ DCR 25A饱和电流"
L2: library part "Inductor Iron", "汇磁一体成型羟基粉电感，1265尺寸，10uH±20%"
L3: library part "Inductor Iron", "小型化一体成型T-CORE热压电感，22uH 2.5*2.0*1.0mm尺寸"
Q1 Q2 Q3 Q4: library part "SON/DFN5x6 MOS", "40V, N-Ch, 2.80m? max, Automotive MOSFET, SSO8(5x6), OptiMOS? 7"
Q5: library part "SOT-23 SS8550 Y2", "三极管"
Q6: library part "SON/DFN5x6 MOS", "PDFN3x3 40V 60A 1.8mΩ N-Ch MOSFET"
Q7 Q9: "Dual N-Channel MOSFET 60V340mA SOT-363"
Q8: library part SI2301CDS-T1-GE3, "MOS(场效应管)"
Q10 Q14: library part JFET-P, "SOT-23-3耗尽型场效应管"
Q11 Q13: library part "2N7002 7002", "单N沟道MOSFET(场效应管)"
Q12: library part "SOT-23 SS8550 Y2", "PNP三极管，SOT-323 封装"
R1 R7: library part shunt, "2512尺寸高能电子束焊接合金检流电阻，2.5mΩ 3W 1%"
R2 R3: library part "0603 0Ω (0R0) 1%", "贴片电阻"
R4: library part "0402 51Ω (51R0) 1%", "贴片电阻"
R5 R6: library part "0603 1.5KΩ (1501) 1%", "贴片电阻"
R8: library part "0402 10Ω (10R0) 1%", "贴片电阻"
R9 R10 R11: library part "0402 6.8KΩ (6801) 1%", "贴片电阻"
R12 R16 R17 R20 R21 R30 R33 R37 R43 R44 R45 R47 R48: library part "0402 10KΩ (1002) 1%", "贴片电阻"
R13: library part "0603 33KΩ (3302) 1%", "贴片电阻"
R14: library part "0603 10KΩ (1002) 1%", "贴片电阻"
R15: library part "0603 330KΩ (3303) 1%", "贴片电阻"
R18: library part shunt, "2512尺寸低温飘合金检流电阻1.0mΩ 3.5W 1% TCR＜25PPM"
R19: library part "0402 2KΩ (2001) 1%", "贴片电阻"
R22: library part "0805 0Ω (0R0) 1%", "贴片电阻"
R23 R24: library part "0603 2.2Ω (2R20) 1%", "贴片电阻"
R25 R26: library part "0402 4.7KΩ (4701) 1%", "贴片电阻"
R27: library part "0402 3.3KΩ (3301) 1%", "贴片电阻"
R28: library part "0402 5.1KΩ (5101) 1%", "测试焊点（特殊情况下焊贴片电阻）"
R29 R39 R40: library part "0402 5.1KΩ (5101) 1%", "贴片电阻"
R31: library part "0402 300KΩ (3003) 1%", "贴片电阻"
R32 R41: library part "0402 510KΩ (5103) 1%", "贴片电阻"
R34 R36: library part "0402 200KΩ (2003) 1%", "贴片电阻"
R35 R38: library part "0402 100KΩ (1003) 1%", "贴片电阻"
R42: library part "0402 150KΩ (1503) 1%", "贴片电阻"
R46: library part "0402 22KΩ (2202) 1%", "贴片电阻"
RL1: "欧姆龙双组触点磁保持贴片继电器"
U1: "支持多种快充协议，最高140W功率的充放电管理SoC"
U2: "Single Schmitt-Trigger Inverter, DCK0005A, LARGE T&R"
U3: library part MPQ2013AGQ-xx-AEC1, "MPS 40V LDO with Enable pin QFN3x3 package"
U4: "具有警报功能的双向36V，16位，高精度I2C总线功率计"
U5: "48V输入，600mA同步降压转换器，SOT-23-6封装"
U6: "具有中断输出、复位和配置寄存器的远程 8 位 I2C 和 SMBus 低功耗   I/O 扩展器"
U7: library part CN8023B, "SOT23-6封装 双向磁保持继电器驱动IC 电压3.5-40V 450mA驱动能力"

## Free pads (board coordinates)
  rrect50% 2x2 hole 1.5 mask+0.03: 0(103.632,59.69)
  round 6 hole 4.05 mask+0.03: 3(74.632,85.217) 4(118.132,60.102) 5(118.132,110.332)
  round 1.6 hole 0.8 mask+0.03: 6(93.893,85.899) 6(93.893,88.439) 6(93.893,90.979) 6(93.893,93.519) 6(98.683,109.809) 6(116.753,95.709) 6(119.293,95.709) 7(101.223,109.809) 8(103.763,109.809) 9(106.303,109.809)
  rect 3x3 hole 1.5 mask+0.03: 10(103.632,96.266)
  round 4 hole 2.4 mask+0.03: 11(90.551,108.204)
  round 3.6 hole 2.4 mask+0.03: 11(125.349,95.758)
  rrect50% 2x2 hole 1.2 mask+0.03: 12(118.237,102.743) 13(121.158,102.743)

## Via types
v1: diameter 0.457, hole 0.254, Top Layer to Bottom Layer, tented both sides, 912 vias

## Nets (pads, with @x,y where several pads share a name; then routed paths per layer and width w, separated by ;. In a path a pad name is that pad's centre, name@x,y a point inside that pad or via, vN(x,y) a via of type N, cw(c..) or ccw(c..) an arc to the next point about the centre after c; other vN are vias at no path point)
5V: C37.1 R41.2 U3.8 U7.5 | length 17.8
  Top Layer w0.508: v1(113.665,81.788) 113.665,84.963 v1(114.173,85.471)
  Signal Layer 1 w0.508: v1(113.665,81.788) 113.665,78.867 114.681,77.851 118.618,77.851 119.507,76.962 v1(119.507,73.66)
  Bottom Layer w0.508: v1(119.507,73.66) U7.5@119.507,74.746
5VEN: R43.2 U3.2 U6.12 | length 31.7
  Top Layer w0.203: R43.2@109.982,102.152 v1(109.982,102.997) ; v1(111.887,102.108) 112.776,102.108 112.976,102.308 U6.12@112.976,103.682
  Signal Layer 1 w0.203: v1(111.887,102.108) 111.887,101.219 113.03,100.076 113.03,98.298 113.673,97.655 115.415,97.655 116.041,97.028 119.888,97.028 120.523,96.393 120.523,90.043 119.761,89.281 115.499,89.281 v1(114.864,89.916)
  Bottom Layer w0.203: v1(109.982,102.997) 110.617,102.997 111.506,102.108 v1(111.887,102.108) ; U3.2@114.864,89.025 v1(114.864,89.916)
226_N: C24.1 R26.1 U4.9 | length 3.2
  Bottom Layer w0.203: R26.1@99.231,90.678 99.822,90.678 100.032,90.888 C24.1@100.584,90.888 100.921,90.888 100.965,90.932 100.965,91.141 102.042,91.141 U4.9@102.042,91.178
226_P: C24.2 R25.1 U4.10 | length 2.9
  Bottom Layer w0.203: R25.1@99.231,91.821 99.949,91.821 100.032,91.738 C24.2@100.584,91.738 100.644,91.678 U4.10@102.042,91.678
\T\C\P\T\_\E\N\: Q9.2 R37.1 U6.6 | length 22
  Top Layer w0.203: U6.6@113.376,97.994 113.376,99.406 113.665,99.695 v1(114.808,99.695)
  Bottom Layer w0.254: Q9.2@110.599,84.201 111.125,84.201 111.423,83.903 R37.1@112.014,83.903 112.605,83.903 112.946,84.244 112.946,91.737 114.597,93.388 114.597,94.808 114.384,95.022 114.384,96.823 114.808,97.247 v1(114.808,99.695)
ABST: C32.2 U5.1 | length 1.9
  Bottom Layer w0.381: C32.2@94.996,101.39 94.996,102.489 95.25,102.743 95.25,103.133 U5.1@95.193,103.19
AEN: R33.1 U5.4 U6.7 | length 36.8
  Top Layer w0.203: v1(99.314,105.791) 99.524,106.001 R33.1@100.203,106.001 ; U6.7@113.776,97.994 113.776,99.044 113.919,99.187 114.572,99.187 114.59,99.169 115.171,99.169 115.443,99.441 115.443,100.076 v1(115.824,100.457)
  Signal Layer 1 w0.203: v1(99.314,105.791) 99.314,107.696 99.822,108.204 99.822,109.96 101.132,111.27 110.98,111.27 112.921,109.329 112.921,105.809 112.794,105.682 112.794,104.757 113.157,104.394 113.848,104.394 114.79,103.452 114.79,101.491 v1(115.824,100.457)
  Bottom Layer w0.203: U5.4@97.593,105.09 97.593,105.594 97.79,105.791 v1(99.314,105.791)
AFB: C36.1 R31.2 R32.1 U5.3 | length 3.8
  Bottom Layer w0.254: R32.1@95.04,108.839 C36.1@95.04,107.696 95.04,106.426 95.04,105.874 95.193,105.721 U5.3@95.193,105.09
ASW: C32.1 L3.2 U5.6
BALCMD: pad.12 Q5.3 | length 18.3
  Top Layer w0.508: Q5.3@114.808,92.944 120.376,92.944 121.539,94.107 121.539,99.441 120.65,100.33 118.872,100.33 118.237,100.965 pad.12@118.237,102.743
BALEN: Q11.1 R21.2 U6.4 | length 4.1
  Top Layer w0.203: Q11.1@112.156,94.216 112.156,94.854 111.931,95.079 R21.2@111.931,95.631 111.931,96.31 112.576,96.955 U6.4@112.576,97.994
BATIS_N: R7.2 R8.1 U1.20 | length 32.9
  Top Layer w0.203: U1.20@105.432,93.746 107.168,93.746 107.696,93.218 107.696,92.202 107.867,92.031 R8.1@108.458,92.031 v1(108.458,91.313) ; R7.2@120.523,76.124 122.758,76.124 v1(123.063,75.819)
  Signal Layer 1 w0.203: v1(108.458,91.313) 108.814,90.957 108.814,88.544 114.173,83.185 118.491,83.185 119.71,81.966 119.71,79.958 120.928,78.74 122.53,78.74 123.292,77.978 123.292,76.048 v1(123.063,75.819)
BATIS_P: C13.2 R7.3 U1.22 | length 35
  Top Layer w0.203: U1.22@106.152,94.866 109.096,94.866 109.264,94.698 C13.2@109.264,94.234 109.264,92.285 109.601,91.948 v1(109.601,91.313) ; v1(123.952,75.819) 124.257,76.124 R7.3@126.924,76.124
  Signal Layer 1 w0.203: v1(109.601,91.313) 109.245,90.957 109.245,88.723 114.352,83.617 118.67,83.617 120.142,82.145 120.142,80.137 121.107,79.172 122.708,79.172 123.723,78.157 123.723,76.048 v1(123.952,75.819)
BATNUM: R9.2 U1.27 | length 3.2
  Top Layer w0.203: U1.27@106.152,96.866 107.082,96.866 107.879,97.663 108.204,97.663 108.414,97.873 R9.2@108.414,98.425
BATT-: C21.1 pad.6@93.893,90.979 pad.13 | length 37.1
  Top Layer w0.254: C21.1@114.046,95.802 114.764,95.802 114.979,96.017 v1(114.979,96.603)
  Signal Layer 1 w0.508: v1(110.236,96.647) 110.28,96.603 110.63,96.603 110.8,96.773 111.362,96.773 111.742,96.393 114.769,96.393 v1(114.979,96.603)
  Bottom Layer w0.508: pad.6@93.893,90.979 95.624,92.71 97.028,92.71 97.917,93.599 105.791,93.599 106.934,94.742 106.934,96.139 107.442,96.647 v1(110.236,96.647) ; v1(114.979,96.603) 115.4,97.024 115.4,98.763 117.094,100.457 120.777,100.457 121.158,100.838 pad.13@121.158,102.743
BST1: C7.1 U1.13 | length 3.8
  Top Layer w0.203: C7.1@101.346,90.432 101.346,91.44 102.632,92.726 U1.13@102.632,93.746
BST2: C14.2 U1.18 | length 3.7
  Top Layer w0.203: U1.18@104.632,93.746 104.632,92.599 105.791,91.44 C14.2@105.791,90.559
CC1: R28.2 RL1.2 U1.37 | length 61.2
  Top Layer w0.203: v1(102.235,103.505) 102.563,103.177 102.563,100.396 103.032,99.927 U1.37@103.032,98.786 ; R28.2@108.585,109.137 v1(108.585,109.601)
  Signal Layer 1 w0.203: v1(102.235,103.505) 100.584,103.505 99.949,102.87 99.949,101.854 99.568,101.473 99.568,100.076 100.675,98.969 100.675,94.214 101.689,93.2 103.721,93.2 105.382,91.539 105.89,91.539 106.662,90.767 106.662,88.664 111.252,84.074 v1(111.252,81.915)
  Bottom Layer w0.203: v1(102.235,103.505) 102.944,103.505 103.368,103.929 103.368,106.924 103.886,107.442 106.934,107.442 108.585,109.093 v1(108.585,109.601) ; v1(111.252,81.915) 111.252,78.74 112.377,77.615 112.377,73.17 113.249,72.298 RL1.2@113.249,68.01
CC2: R29.2 RL1.7 U1.34 | length 60.9
  Top Layer w0.203: v1(102.235,105.791) 102.344,105.791 103.759,104.376 103.759,100.892 104.232,100.419 U1.34@104.232,98.786 ; v1(108.458,110.363) 108.585,110.363 108.839,110.109 109.746,110.109 109.764,110.091 110.364,110.091 110.508,110.235 110.508,110.635 110.617,110.744 R29.2@111.208,110.744
  Signal Layer 1 w0.203: v1(102.235,105.791) 102.743,105.791 103.124,105.41 103.124,103.378 102.616,102.87 100.876,102.87 100.376,102.37 100.376,101.554 101.074,100.856 101.074,94.379 101.854,93.599 103.886,93.599 105.537,91.948 106.045,91.948 107.061,90.932 107.061,88.9 112.141,83.82 v1(112.141,81.915)
  Bottom Layer w0.203: v1(102.235,105.791) 102.743,105.791 102.87,105.918 102.87,106.99 103.721,107.841 106.769,107.841 107.862,108.934 107.862,110.069 108.156,110.363 v1(108.458,110.363) ; v1(112.141,81.915) 112.141,79.121 113.249,78.013 RL1.7@113.249,75.246
CCDOWN: Q7.3 R28.1 | length 1.4
  Top Layer w0.254: R28.1@108.585,108.287 109.137,108.287 109.362,108.062 Q7.3@109.873,108.062
CHG-: pad.11@90.551,108.204 R18.0
  other v1: 92.329,98.806 92.837,98.806 93.345,98.806 93.853,98.806 92.329,99.314 92.837,99.314 93.345,99.314 93.853,99.314 92.329,99.822 92.837,99.822 93.345,99.822 93.853,99.822 92.329,100.33 92.837,100.33 93.345,100.33 93.853,100.33 92.329,100.838 92.837,100.838 93.345,100.838 93.853,100.838 92.329,101.346 92.837,101.346 93.345,101.346 93.853,101.346 92.329,101.854 92.837,101.854 93.345,101.854 93.853,101.854
CSN1: C8.1 R4.1 R27.1 U1.10 | length 6.3
  Top Layer w0.203: R27.1@97.917,92.627 97.917,93.98 99.314,93.98 99.8,94.466 U1.10@101.112,94.466 ; R27.1@97.961,92.583 97.961,91.904 97.969,91.896 R4.1@97.969,91.094
  Top Layer w0.254: R27.1@97.961,92.583 R27.1@97.969,92.575
CSN2: C13.1 R8.2 U1.21 | length 3.7
  Top Layer w0.203: U1.21@106.152,94.466 107.061,94.466 107.293,94.234 C13.1@108.414,94.234 108.414,93.643 108.458,93.599 R8.2@108.458,92.881
EN: R13.1 R14.2 U1.33 | length 11.7
  Top Layer w0.203: U1.33@104.632,98.786 104.632,100.319 v1(104.77,100.457) ; R14.2@106.426,106.434 107.307,106.434 107.442,106.299 107.442,105.029 107.577,104.894 R13.1@108.331,104.894
  Signal Layer 1 w0.203: v1(104.77,100.457) 105.538,100.457 107.442,102.361 v1(107.442,105.537)
GND: C1.1 C2.1 C3.1 C4.2 C5.1 C6.1 C9.1 C10.1 C11.1 C12.2 C15.1 C16.2 C17.2 C18.1 C19.1 C20.1 C21.2 C22.1 C23.1 C25.2 C26.1 C27.1 C28.1 C29.1 C30.1 C31.1 C33.1 C34.1 C35.1 C37.2 C38.2 D5.K D8.1 D9.1 J1.1 pad.0 pad.6@119.293,95.709 pad.10 Q3.1 Q3.2 Q3.3 Q4.1 Q4.2 Q4.3 Q7.1 Q7.4 Q9.1 Q9.4 Q10.2 Q11.2 Q13.2 Q14.2 R9.1 R10.1 R11.1 R12.1 R14.1 R15.1 R18.1 R21.1 R30.2 R31.1 R33.2 R36.2 R37.2 R42.1 R43.1 R44.1 R45.1 R46.2 R48.2 U1.26 U1.41 U2.3 U3.4 U3.9 U4.1 U4.2 U4.7 U5.2 U6.1 U6.2 U6.8 U7.2 | length 80.4
  Top Layer w0.203: 95.631,96.774 C1.1@97.111,96.774 C2.1@97.111,95.377 ; C19.1@98.723,102.108 v1(99.187,102.108) ; v1(98.948,97.932) U2.3@98.948,98.57 ; U1.41@103.832,96.466 U1.26@106.152,96.466 ; C18.1@104.394,102.152 R10.1@105.791,102.152 v1(106.49,102.152) R11.1@107.188,102.152 ; C15.1@109.264,95.631 v1(109.855,95.631) ; C17.2@109.264,97.028 v1(109.264,97.663) C16.2@109.264,99.822 109.264,100.372 109.476,100.584 109.855,100.584 109.982,100.711 R43.1@109.982,101.302 ; Q7.1@109.873,109.362 110.378,109.362 v1(110.744,109.728) ; v1(110.856,93.487) Q11.2@110.856,94.216 ; R21.1@111.081,95.631 v1(111.081,96.095) ; U6.1@111.376,97.994 v1(111.376,99.254) 111.546,99.254 111.776,99.023 U6.2@111.776,97.994 ; Q7.4@112.123,108.062 112.123,107.551 111.931,107.359 v1(111.931,106.978) C20.1@111.931,106.553 R30.2@113.538,106.553 ; v1(114.046,94.107) C21.2@114.046,94.952 113.455,94.952 113.157,95.25 113.157,96.139 113.538,96.52 113.792,96.52 114.176,96.904 U6.8@114.176,97.994 ; D5.K@119.007,98.298 v1(119.007,99.052)
  Top Layer w0.254: R33.2@100.203,106.851 v1(100.203,107.315) ; R44.1@109.982,104.692 v1(109.982,105.283)
  Top Layer w0.381: v1(104.633,103.52) 104.648,103.535 R15.1@104.648,104.894 R14.1@106.426,104.894
  Top Layer w0.508: v1@87.63,65.913 C22.1@89.527,65.913 89.527,64.905 ; 122.047,66.167 122.047,70.612 ; C23.1@122.055,68.707 123.19,68.707 ; 123.444,101.219 123.615,101.048 C31.1@124.714,101.048 v1(124.714,100.076)
  Bottom Layer w0.203: C38.2@114.173,91.611 114.725,91.611 v1(114.808,91.694) ; C37.2@114.3,83.177 114.419,83.058 115.062,83.058 115.443,83.439 R42.1@115.907,83.439 ; U3.9@115.189,87.63 115.443,87.63 116.205,88.392 116.164,88.433 U3.4@116.164,89.025
  Bottom Layer w0.254: v1(99.695,89.916) 99.708,89.929 100.076,89.929 100.325,90.178 U4.7@102.042,90.178 ; C26.1@100.711,77.343 103.759,77.343 104.074,77.028 Q10.2@104.074,75.166 ; Q13.2@104.633,104.285 v1(104.633,103.52) 104.731,103.422 R48.2@104.731,102.87 ; U4.2@106.492,91.178 105.545,91.178 105.283,91.44 105.283,91.694 ; U4.1@106.492,91.678 105.299,91.678 105.283,91.694 ; v1(106.553,92.329) 105.41,92.329 105.283,92.202 105.283,91.694 ; R36.2@106.934,83.776 107.359,83.776 107.584,83.551 Q9.4@108.349,83.551 109.205,83.551 v1(109.474,83.82) 109.474,84.455 109.87,84.851 Q9.1@110.599,84.851 111.364,84.851 111.462,84.753 R37.2@112.014,84.753
  Bottom Layer w0.381: Q14.2@104.249,69.662 104.249,68.979 v1(104.394,68.834) ; v1@106.553,74.422 v1(106.597,74.378) R46.2@106.597,73.914
  Bottom Layer w0.508: C25.2@99.651,89.281 99.651,89.859 v1@99.695,89.903 ; v1@112.903,83.185 v1(112.911,83.177) C37.2@114.3,83.177 ; v1(119.293,94.02) pad.6@119.293,95.709 119.293,97.496 ; U7.2@119.507,77.146 119.507,81.28 119.888,81.661 120.65,81.661
  other v1: 101.854,58.166 102.362,58.166 102.87,58.166 103.378,58.166 103.886,58.166 104.394,58.166 104.902,58.166 101.854,58.674 102.362,58.674 104.902,58.674 100.203,58.801 100.711,58.801 106.426,58.928 106.934,58.928 104.902,59.182 105.41,59.182 104.902,59.69 105.41,59.69 100.203,60.071 100.711,60.071 106.426,60.071 106.934,60.071 104.902,60.198 105.41,60.198 101.854,60.706 102.362,60.706 104.902,60.706 105.41,60.706 100.203,61.214 100.711,61.214 101.854,61.214 102.362,61.214 102.87,61.214 103.378,61.214 103.886,61.214 104.394,61.214 104.902,61.214 105.41,61.214 106.426,61.214 106.934,61.214 101.854,61.722 102.362,61.722 102.87,61.722 103.378,61.722 103.886,61.722 104.394,61.722 104.902,61.722 105.41,61.722 101.854,62.23 102.362,62.23 102.87,62.23 103.378,62.23 103.886,62.23 104.394,62.23 104.902,62.23 105.41,62.23 106.426,62.484 106.934,62.484 101.854,62.738 102.362,62.738 102.87,62.738 103.378,62.738 103.886,62.738 104.394,62.738 104.902,62.738 105.41,62.738 101.854,63.246 102.362,63.246 102.87,63.246 103.378,63.246 103.886,63.246 104.394,63.246 104.902,63.246 101.854,63.754 102.362,63.754 102.87,63.754 103.378,63.754 103.886,63.754 104.394,63.754 104.902,63.754 106.299,64.135 106.807,64.135 100.584,64.262 101.854,64.262 102.362,64.262 102.87,64.262 103.378,64.262 103.886,64.262 104.394,64.262 104.902,64.262 106.299,64.643 106.807,64.643 100.584,64.77 101.854,64.77 102.362,64.77 102.87,64.77 103.378,64.77 103.886,64.77 104.394,64.77 104.902,64.77 83.058,65.024 83.566,65.024 84.074,65.024 84.582,65.024 85.09,65.024 85.598,65.024 86.106,65.024 86.614,65.024 87.122,65.024 87.63,65.024 106.299,65.151 106.807,65.151 100.584,65.278 101.854,65.278 102.362,65.278 102.87,65.278 103.378,65.278 103.886,65.278 104.394,65.278 104.902,65.278 82.55,65.532 83.058,65.532 83.566,65.532 84.074,65.532 84.582,65.532 85.09,65.532 85.598,65.532 86.106,65.532 86.614,65.532 87.122,65.532 87.63,65.532 106.299,65.659 106.807,65.659 100.584,65.786 101.854,65.786 102.362,65.786 102.87,65.786 103.378,65.786 103.886,65.786 104.394,65.786 104.902,65.786 82.55,66.04 83.058,66.04 83.566,66.04 84.074,66.04 84.582,66.04 85.09,66.04 85.598,66.04 86.106,66.04 86.614,66.04 87.122,66.04 87.63,66.04 106.299,66.167 106.807,66.167 100.584,66.294 101.854,66.294 102.362,66.294 102.87,66.294 103.378,66.294 103.886,66.294 104.394,66.294 104.902,66.294 122.809,66.294 123.317,66.294 123.825,66.294 82.55,66.548 83.058,66.548 83.566,66.548 84.074,66.548 84.582,66.548 85.09,66.548 85.598,66.548 86.106,66.548 86.614,66.548 87.122,66.548 87.63,66.548 106.299,66.675 106.807,66.675 100.584,66.802 101.854,66.802 102.362,66.802 102.87,66.802 103.378,66.802 103.886,66.802 104.394,66.802 104.902,66.802 122.809,66.802 123.317,66.802 123.825,66.802 106.299,67.183 106.807,67.183 100.584,67.31 101.854,67.31 102.362,67.31 102.87,67.31 103.378,67.31 103.886,67.31 104.394,67.31 104.902,67.31 122.809,67.31 123.317,67.31 123.825,67.31 106.299,67.691 106.807,67.691 100.584,67.818 101.854,67.818 102.362,67.818 102.87,67.818 103.378,67.818 103.886,67.818 104.394,67.818 104.902,67.818 123.317,67.818 123.825,67.818 81.407,68.072 106.299,68.199 106.807,68.199 100.584,68.326 101.854,68.326 102.362,68.326 102.87,68.326 103.378,68.326 103.886,68.326 104.394,68.326 104.902,68.326 123.317,68.326 123.825,68.326 81.407,68.58 106.299,68.707 106.807,68.707 101.854,68.834 102.362,68.834 102.87,68.834 103.378,68.834 103.886,68.834 104.902,68.834 81.407,69.088 81.915,69.088 82.423,69.088 82.931,69.088 83.439,69.088 83.947,69.088 84.455,69.088 84.963,69.088 85.471,69.088 85.979,69.088 86.487,69.088 86.995,69.088 87.503,69.088 106.299,69.215 106.807,69.215 101.854,69.342 102.362,69.342 102.87,69.342 81.407,69.596 81.915,69.596 82.423,69.596 82.931,69.596 83.439,69.596 83.947,69.596 84.455,69.596 84.963,69.596 85.471,69.596 85.979,69.596 86.487,69.596 86.995,69.596 87.503,69.596 106.299,69.723 106.807,69.723 101.854,69.85 102.362,69.85 102.87,69.85 81.407,70.104 81.407,70.612 81.407,71.12 81.407,71.628 81.407,72.136 128.651,75.946 77.216,77.597 77.724,77.597 78.232,77.597 78.74,77.597 77.216,78.105 77.724,78.105 78.232,78.105 78.74,78.105 77.216,78.613 77.724,78.613 78.232,78.613 78.74,78.613 77.216,79.248 77.724,79.248 78.232,79.248 78.74,79.248 79.756,79.248 80.264,79.248 80.772,79.248 83.185,79.248 83.693,79.248 77.216,79.756 77.724,79.756 78.232,79.756 78.74,79.756 79.756,79.756 80.264,79.756 80.772,79.756 83.185,79.756 83.693,79.756 77.216,80.264 77.724,80.264 78.232,80.264 78.74,80.264 83.185,80.264 80.772,80.391 122.301,80.518 77.216,80.772 77.724,80.772 78.232,80.772 78.74,80.772 80.772,81.026 81.28,81.026 81.788,81.026 82.296,81.026 82.804,81.026 121.793,81.026 122.301,81.026 77.216,81.28 77.724,81.28 78.232,81.28 78.74,81.28 121.793,81.534 122.301,81.534 78.232,81.788 78.74,81.788 121.793,82.042 122.301,82.042 122.809,82.042 123.317,82.042 123.825,82.042 124.333,82.042 78.74,82.296 121.285,82.55 121.793,82.55 122.301,82.55 122.809,82.55 123.317,82.55 123.825,82.55 78.74,82.804 78.74,83.312 78.74,83.82 102.362,83.82 102.997,83.82 104.267,83.82 78.74,84.328 94.361,84.582 78.74,84.836 78.74,85.344 78.74,85.852 103.632,85.979 101.6,86.233 102.235,86.233 78.74,86.36 105.029,86.36 105.791,86.36 103.632,86.487 78.74,86.868 102.235,86.995 105.029,86.995 103.632,87.122 78.74,87.376 114.3,87.376 114.808,87.376 115.316,87.376 115.824,87.376 102.235,87.63 105.029,87.63 78.74,87.884 106.426,88.011 114.3,88.011 114.808,88.011 115.316,88.011 115.824,88.011 102.616,88.265 104.775,88.265 78.232,88.392 78.74,88.392 76.2,88.9 76.708,88.9 77.216,88.9 77.724,88.9 78.232,88.9 78.74,88.9 76.2,89.408 76.708,89.408 77.216,89.408 77.724,89.408 78.232,89.408 78.74,89.408 80.772,89.408 81.407,89.408 81.915,89.408 82.423,89.408 82.931,89.408 76.2,89.916 76.708,89.916 77.216,89.916 77.724,89.916 78.232,89.916 78.74,89.916 80.772,89.916 82.931,89.916 76.2,90.424 76.708,90.424 77.216,90.424 77.724,90.424 78.232,90.424 78.74,90.424 80.772,90.424 83.439,90.805 83.947,90.805 86.868,90.805 87.376,90.805 87.884,90.805 76.2,90.932 76.708,90.932 77.216,90.932 77.724,90.932 78.232,90.932 78.74,90.932 79.756,90.932 80.264,90.932 80.772,90.932 86.868,91.313 87.376,91.313 87.884,91.313 76.2,91.44 76.708,91.44 77.216,91.44 77.724,91.44 78.232,91.44 78.74,91.44 83.185,91.821 86.868,91.821 87.376,91.821 87.884,91.821 76.2,91.948 76.708,91.948 77.216,91.948 77.724,91.948 78.232,91.948 78.74,91.948 80.645,92.329 81.153,92.329 81.661,92.329 82.169,92.329 82.677,92.329 83.185,92.329 86.868,92.329 87.376,92.329 87.884,92.329 76.2,92.456 76.708,92.456 77.216,92.456 77.724,92.456 78.232,92.456 78.74,92.456 80.645,92.837 81.153,92.837 81.661,92.837 82.169,92.837 82.677,92.837 83.185,92.837 86.868,92.837 87.376,92.837 87.884,92.837 76.2,92.964 76.708,92.964 77.216,92.964 77.724,92.964 78.232,92.964 78.74,92.964 80.645,93.345 81.153,93.345 81.661,93.345 82.169,93.345 82.677,93.345 83.185,93.345 86.868,93.345 87.376,93.345 87.884,93.345 76.2,93.472 76.708,93.472 77.216,93.472 77.724,93.472 78.232,93.472 78.74,93.472 80.645,93.853 81.153,93.853 81.661,93.853 82.169,93.853 82.677,93.853 83.185,93.853 86.868,93.853 87.376,93.853 87.884,93.853 76.2,93.98 76.708,93.98 77.216,93.98 77.724,93.98 78.232,93.98 78.74,93.98 118.745,93.98 119.888,93.98 80.645,94.361 81.153,94.361 81.661,94.361 82.169,94.361 82.677,94.361 83.185,94.361 86.868,94.361 87.376,94.361 87.884,94.361 76.2,94.488 76.708,94.488 77.216,94.488 77.724,94.488 78.232,94.488 78.74,94.488 80.645,94.869 81.153,94.869 81.661,94.869 82.169,94.869 82.677,94.869 83.185,94.869 86.868,94.869 87.376,94.869 87.884,94.869 80.645,95.377 81.153,95.377 81.661,95.377 82.169,95.377 82.677,95.377 83.185,95.377 86.868,95.377 87.376,95.377 87.884,95.377 91.948,95.377 92.456,95.377 92.964,95.377 93.472,95.377 93.98,95.377 80.645,95.885 81.153,95.885 81.661,95.885 82.169,95.885 82.677,95.885 83.185,95.885 86.868,95.885 87.376,95.885 87.884,95.885 91.948,95.885 92.456,95.885 92.964,95.885 93.472,95.885 93.98,95.885 80.645,96.393 81.153,96.393 81.661,96.393 82.169,96.393 82.677,96.393 83.185,96.393 86.868,96.393 87.376,96.393 87.884,96.393 124.206,99.568 124.714,99.568 125.222,99.568 125.73,99.568 126.238,99.568 126.746,99.568 124.206,100.076 125.222,100.076 125.73,100.076 126.238,100.076 126.746,100.076 84.201,100.203 84.709,100.203 85.217,100.203 85.725,100.203 86.233,100.203 86.741,100.203 87.249,100.203 80.518,100.457 125.73,100.584 126.238,100.584 126.746,100.584 84.201,100.711 84.709,100.711 85.217,100.711 85.725,100.711 86.233,100.711 86.741,100.711 87.249,100.711 80.518,101.092 125.73,101.092 126.238,101.092 126.746,101.092 84.201,101.219 84.709,101.219 85.217,101.219 85.725,101.219 86.233,101.219 86.741,101.219 87.249,101.219 84.709,101.727 85.217,101.727 85.725,101.727 86.233,101.727 86.741,101.727 87.249,101.727 80.899,101.854 81.407,102.362 81.915,102.87 82.296,103.378 82.804,103.886 83.185,104.394 83.693,104.902 84.201,105.156 84.836,105.156 96.774,109.855 96.266,110.363 96.774,110.363 92.202,110.998 92.71,110.998 93.218,110.998 93.726,110.998 94.234,110.998 92.202,111.506 92.71,111.506 93.218,111.506 93.726,111.506 94.234,111.506 92.202,112.014 92.71,112.014 93.218,112.014 93.726,112.014 94.234,112.014 95.377,112.014 95.885,112.014 96.393,112.014
HG1: D1.2 R2.1 U1.12 | length 12.6
  Top Layer w0.203: D1.2@96.901,85 97.499,85 97.909,84.59 R2.1@98.679,84.59 98.679,86.233 100.33,87.884 100.33,91.186 102.232,93.088 U1.12@102.232,93.746
HG2: D4.2 R6.2 U1.19 | length 12.5
  Top Layer w0.203: U1.19@105.032,93.746 105.032,92.834 107.061,90.805 107.061,87.63 108.458,86.233 R6.2@108.458,84.59 109.228,84.59 109.638,85 D4.2@110.236,85
HG_TC: D1.1 Q1.4 R2.2 | length 17.4
  Top Layer w0.381: v1(92.964,72.263) Q1.4@92.964,73.086 ; D1.1@96.901,82.64 97.499,82.64 v1(97.704,82.845) 97.909,83.05 R2.2@98.679,83.05
  Signal Layer 1 w0.381: v1(92.964,72.263) 96.52,72.263 96.774,72.517 96.774,81.915 v1(97.704,82.845)
HG_VB: D4.1 Q2.4 R6.1 | length 20.8
  Top Layer w0.381: R6.1@108.458,83.05 109.228,83.05 v1(109.433,82.845) 109.638,82.64 D4.1@110.236,82.64 ; v1(118.237,72.263) Q2.4@118.237,73.086
  Signal Layer 1 w0.381: v1(109.433,82.845) 109.433,76.749 111.379,74.803 117.856,74.803 118.237,74.422 v1(118.237,72.263)
INPUTDIS: Q13.1 R48.1 U6.9 | length 39.7
  Top Layer w0.203: U6.9@114.176,103.682 114.176,104.651 114.3,104.775 115.189,104.775 115.443,104.521 v1(115.443,103.759) ; v1(114.935,95.25) 115.316,95.25 115.57,95.504 115.57,97.935 115.552,97.953 115.552,98.788 116.459,99.695 116.459,101.219 v1(116.713,101.473)
  Signal Layer 1 w0.203: v1(105.757,103.471) 105.757,106.138 106.172,106.553 108.077,106.553 108.966,105.664 108.966,99.568 109.982,98.552 109.982,97.409 109.329,96.756 109.329,95.413 109.637,95.105 114.79,95.105 v1(114.935,95.25)
  Bottom Layer w0.203: v1(115.443,103.759) 114.554,102.87 114.554,101.854 114.935,101.473 v1(116.713,101.473)
  Bottom Layer w0.254: R48.1@105.581,102.87 105.581,103.295 v1(105.757,103.471) 105.933,103.647 Q13.1@105.933,104.285
IOUTSEN_N: pad.6@93.893,85.899 R18.3 | length 24.8
  Top Layer w0.254: R18.3@86.563,105.359 v1(88.519,105.359)
  Bottom Layer w0.254: v1(88.519,105.359) 88.748,105.13 88.748,103.813 89.284,103.276 90.551,103.276 90.551,94.822 91.592,93.78 91.592,87.464 92.129,86.928 92.864,86.928 pad.6@93.893,85.899
IOUTSEN_P: pad.6@93.893,88.439 R18.2 | length 25.6
  Top Layer w0.254: v1(89.459,105.359) R18.2@92.964,105.359
  Bottom Layer w0.254: v1(89.459,105.359) 89.23,105.13 89.23,104.013 89.484,103.759 90.751,103.759 91.034,103.476 91.034,95.021 92.075,93.98 92.075,87.664 92.329,87.41 92.864,87.41 pad.6@93.893,88.439
ISEN_N: R1.3 R4.2 R26.2 U1.11 | length 36.6
  Top Layer w0.203: R4.2@97.969,90.244 98.499,90.244 98.679,90.424 98.679,92.964 98.933,93.218 99.441,93.218 99.969,93.746 U1.11@101.832,93.746
  Top Layer w0.254: R4.2@97.969,90.244 97.969,89.61 v1(98.298,89.281)
  Top Layer w0.381: v1(85.217,73.025) 85.649,73.457 R1.3@86.919,73.457
  Signal Layer 1 w0.254: v1(85.217,73.025) 84.557,73.025 84.049,73.533 84.049,76.175 90.932,83.058 94.916,83.058 98.019,86.16 98.019,89.002 v1(98.298,89.281)
  Bottom Layer w0.254: v1(98.298,89.281) 98.298,89.916 98.425,90.043 98.425,90.634 R26.2@98.381,90.678
ISEN_P: C8.2 R1.2 R25.2 R27.2 U1.9 | length 40
  Top Layer w0.203: C8.2@97.111,93.98 97.111,94.444 97.282,94.615 99.06,94.615 99.311,94.866 U1.9@100.858,94.866
  Top Layer w0.254: C8.2@97.111,93.98 97.111,91.357 97.282,91.186 v1(97.282,89.281)
  Top Layer w0.381: R1.2@80.518,73.457 81.61,73.457 v1(82.169,72.898)
  Signal Layer 1 w0.254: v1(82.169,72.898) 82.931,72.898 83.566,73.533 83.566,76.374 90.732,83.541 94.717,83.541 97.536,86.36 97.536,89.027 v1(97.282,89.281)
  Bottom Layer w0.203: v1(97.282,89.281) 97.282,91.313 97.79,91.821 R25.2@98.381,91.821
LG1: D2.2 R3.1 U1.15 | length 10.9
  Top Layer w0.203: D2.2@102.87,85 102.87,87.503 103.154,87.787 103.154,91.186 103.432,91.464 U1.15@103.432,93.746
  Top Layer w0.254: R3.1@101.092,84.59 101.862,84.59 102.272,85 D2.2@102.87,85
LG2: D3.2 R5.2 U1.16 | length 10.9
  Top Layer w0.203: U1.16@103.832,93.746 103.832,91.494 104.14,91.186 104.14,87.757 104.394,87.503 D3.2@104.394,85 105.119,85 105.529,84.59 R5.2@106.172,84.59
LG_TC: D2.1 Q3.4 R3.2 | length 23.6
  Top Layer w0.381: Q3.4@100.523,61.976 100.523,62.677 v1(100.584,62.738) ; R3.2@101.092,83.05 v1(101.862,83.05) 102.272,82.64 D2.1@102.87,82.64
  Signal Layer 1 w0.381: v1(100.584,62.738) 100.584,63.246 101.219,63.881 101.219,82.407 v1(101.862,83.05)
LG_VB: D3.1 Q4.4 R5.1 | length 30.9
  Top Layer w0.381: D3.1@104.394,82.64 104.992,82.64 v1(105.197,82.845) 105.402,83.05 R5.1@106.172,83.05 ; v1(105.918,58.166) Q4.4@106.741,58.166
  Signal Layer 1 w0.381: v1(105.197,82.845) 105.664,82.378 105.664,63.754 106.172,63.246 107.315,63.246 107.696,62.865 107.696,58.293 107.569,58.166 v1(105.918,58.166)
NetC22_2: C22.2 R23.1 | length 1.9
  Top Layer w0.508: C22.2@91.067,65.913 R23.1@92.956,65.913
NetC23_2: C23.2 R24.1 | length 1.8
  Top Layer w0.508: R24.1@118.753,68.707 C23.2@120.515,68.707
NetC38_1: C38.1 D6.2 D7.2 U3.1 | length 1.5
  Bottom Layer w0.254: D6.2@117.221,90.387 D7.2@118.745,90.387
NetD5_A: D5.A R19.2 | length 26
  Top Layer w0.203: R19.2@100.203,104.565 100.707,104.565 101.346,105.204 101.346,106.426 101.727,106.807 v1(102.235,106.807) ; v1(116.078,98.171) 116.586,98.171 116.713,98.298 D5.A@117.467,98.298
  Signal Layer 1 w0.203: v1(102.235,106.807) 102.87,106.807 103.505,107.442 110.617,107.442 111.506,106.553 111.506,105.41 111.76,105.156 112.268,105.156 112.395,105.029 112.395,104.592 112.992,103.995 113.683,103.995 114.173,103.505 114.173,101.346 116.078,99.441 v1(116.078,98.171)
NetD8_2: D8.2 Q10.1 R40.2 | length 7.9
  Bottom Layer w0.254: D8.2@100.584,73.115 101.817,73.115 102.174,73.472 102.174,74.168 ; Q10.1@102.174,75.166 102.174,74.168 ; R40.2@105.747,75.311 105.029,75.311 104.902,75.184 104.902,74.422 104.648,74.168 102.174,74.168
NetD9_2: D9.2 Q14.1 R39.2 | length 6
  Bottom Layer w0.254: D9.2@100.584,71.665 101.817,71.665 101.92,71.562 Q14.1@104.249,71.562 105.471,71.562 105.747,71.838 R39.2@105.747,72.517
NetQ1_5: Q1.5 Q1.6 Q1.7 Q1.8 R1.1
NetQ2_5: Q2.5 Q2.6 Q2.7 Q2.8 R7.0
NetQ5_1: Q5.1 R20.2 | length 2
  Top Layer w0.381: R20.2@111.887,90.424 Q5.1@113.838,90.424
NetQ7_6: Q7.6 R29.1 | length 1.4
  Top Layer w0.203: R29.1@112.058,110.744 112.058,109.938 112.123,109.873 Q7.6@112.123,109.362
NetQ8_1: Q8.1 R35.2 R38.1 | length 2.7
  Bottom Layer w0.203: Q8.1@98.407,84.724 99.172,84.724 99.27,84.626 R38.1@99.695,84.626 R35.2@101.092,84.626
NetQ9_3: Q9.3 R35.1 | length 11.9
  Bottom Layer w0.203: R35.1@101.092,83.776 101.092,83.058 101.981,82.169 110.363,82.169 110.617,82.423 110.617,83.533 Q9.3@110.599,83.551
NetQ9_5: Q9.5 Q9.6 R34.1 R36.1 | length 4.7
  Bottom Layer w0.203: R34.1@105.664,83.776 106.255,83.776 106.286,83.807 106.286,84.455 106.457,84.626 R36.1@106.934,84.626 107.017,84.709 107.569,84.709 ; Q9.5@108.349,84.201 107.696,84.201 107.569,84.328 107.569,84.709 ; Q9.6@108.349,84.851 107.711,84.851 107.569,84.709
NetQ11_3: Q11.3 R20.1 | length 1.7
  Top Layer w0.229: R20.1@111.037,90.424 111.037,90.971 111.506,91.44 Q11.3@111.506,91.966
NetQ12_1: Q12.1 R47.2 | length 1.5
  Bottom Layer w0.305: R47.2@108.375,102.87 108.331,102.914 108.331,103.378 108.473,103.52 Q12.1@108.473,104.285
NetQ13_3: Q13.3 R47.1 | length 5.3
  Bottom Layer w0.203: Q13.3@105.283,106.535 105.283,105.664 105.537,105.41 106.172,105.41 106.553,105.029 106.553,103.251 106.934,102.87 R47.1@107.525,102.87